# Altium PCB AFE.PcbDoc (part 1 of 3)
Units mm, origin at the board's own origin, x right, y up, seen from the top; angles counter-clockwise.
Board outline 95 x 50 mm, 4 copper layers (Top Layer, Ground Plane, +5V Power Plane, Bottom Layer), stack 0.778 mm thick; 152 components, 132 nets, 460 pads, 163 vias.
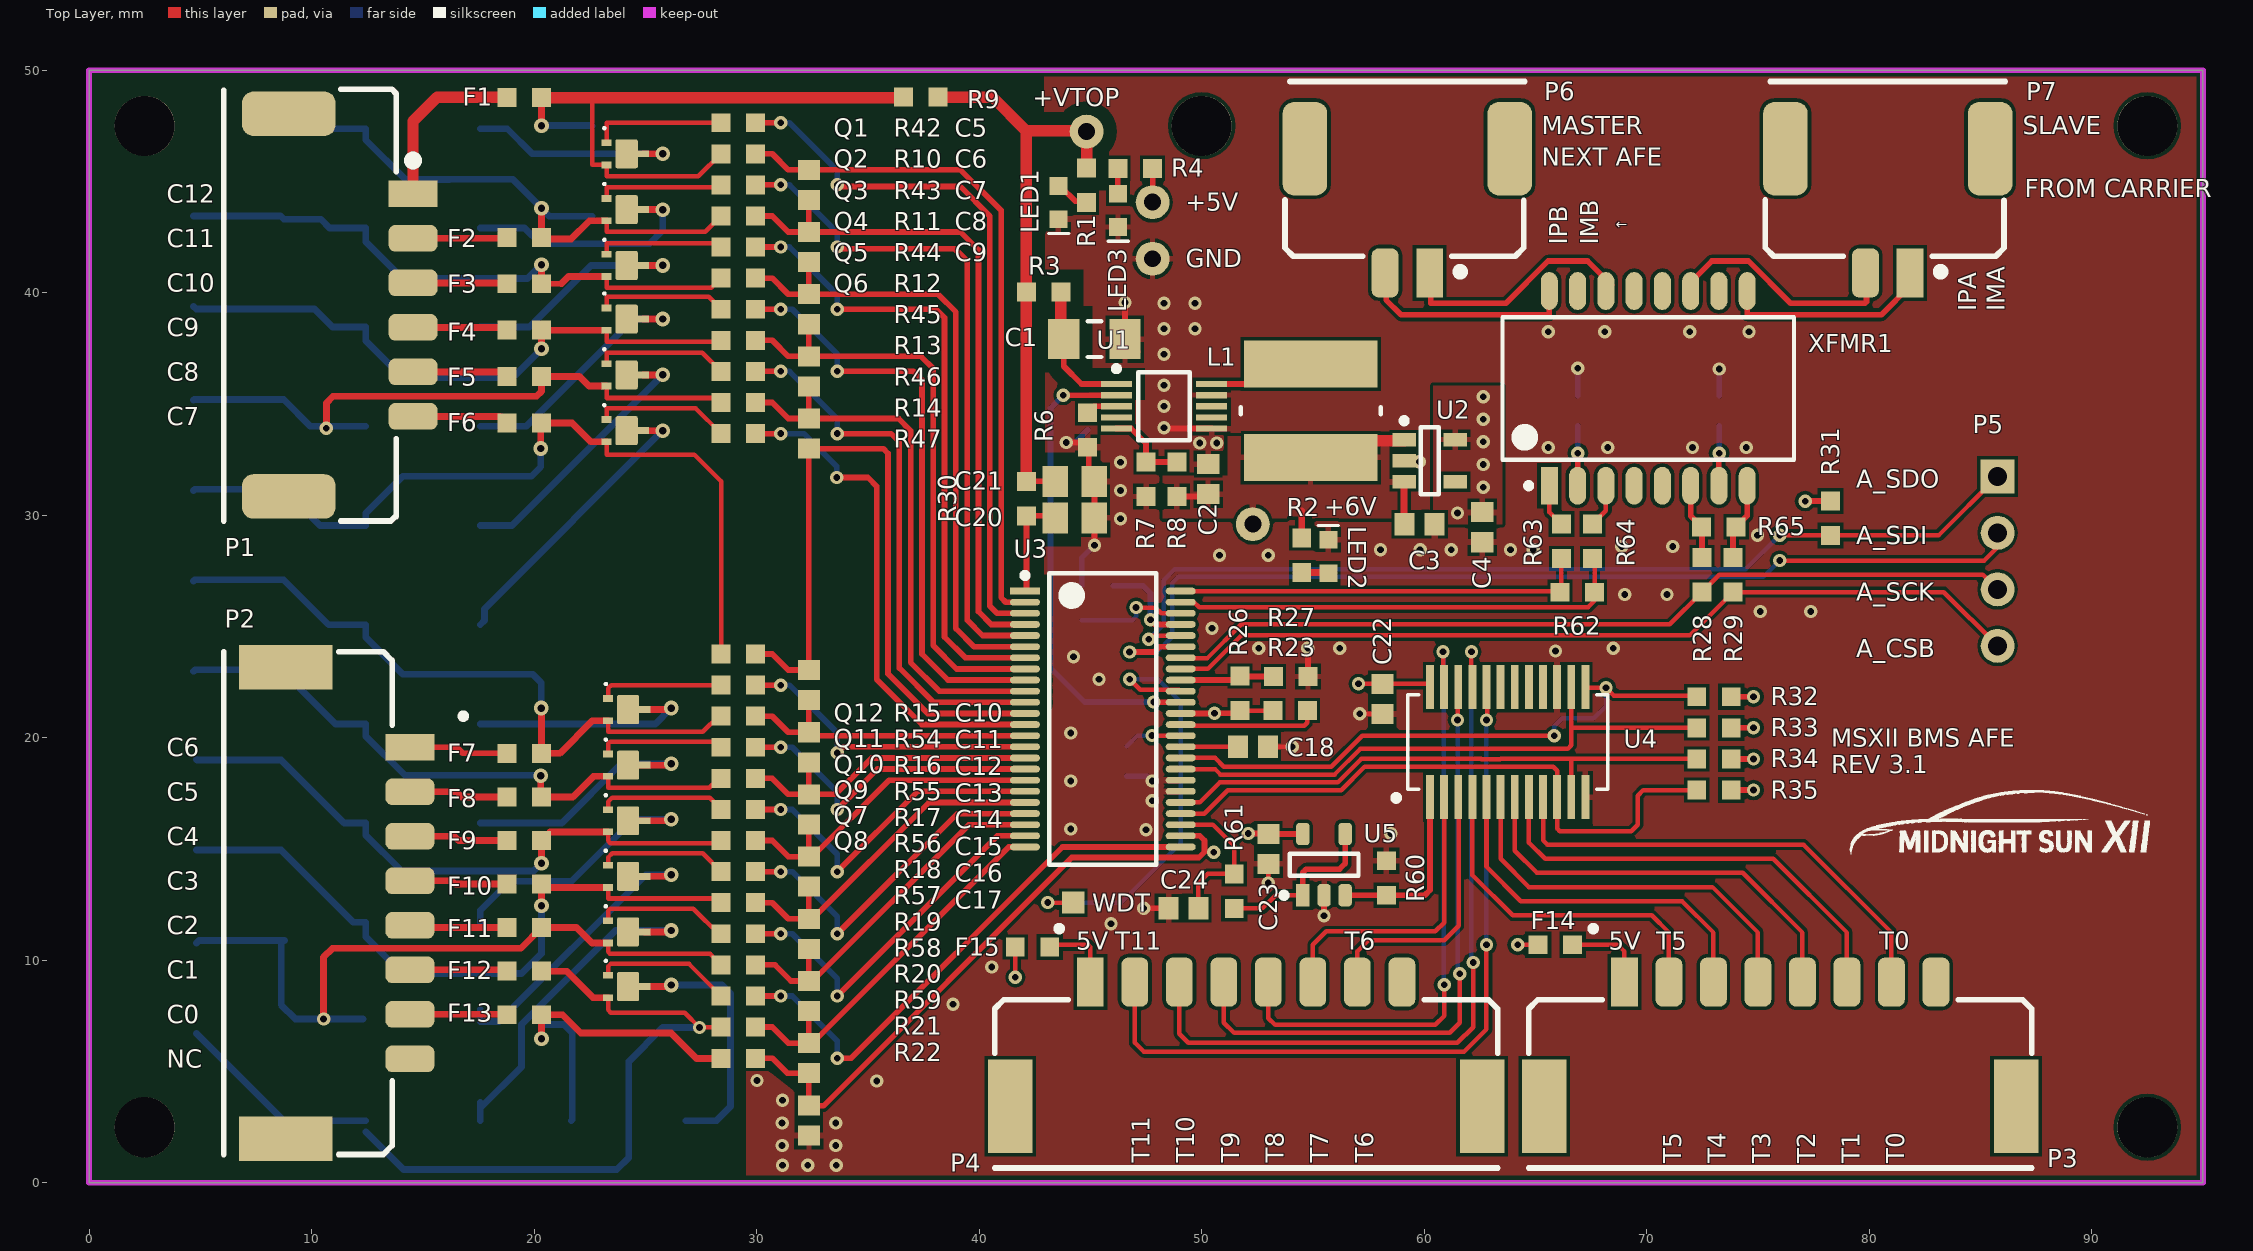
[diagram p0: Top Layer view]
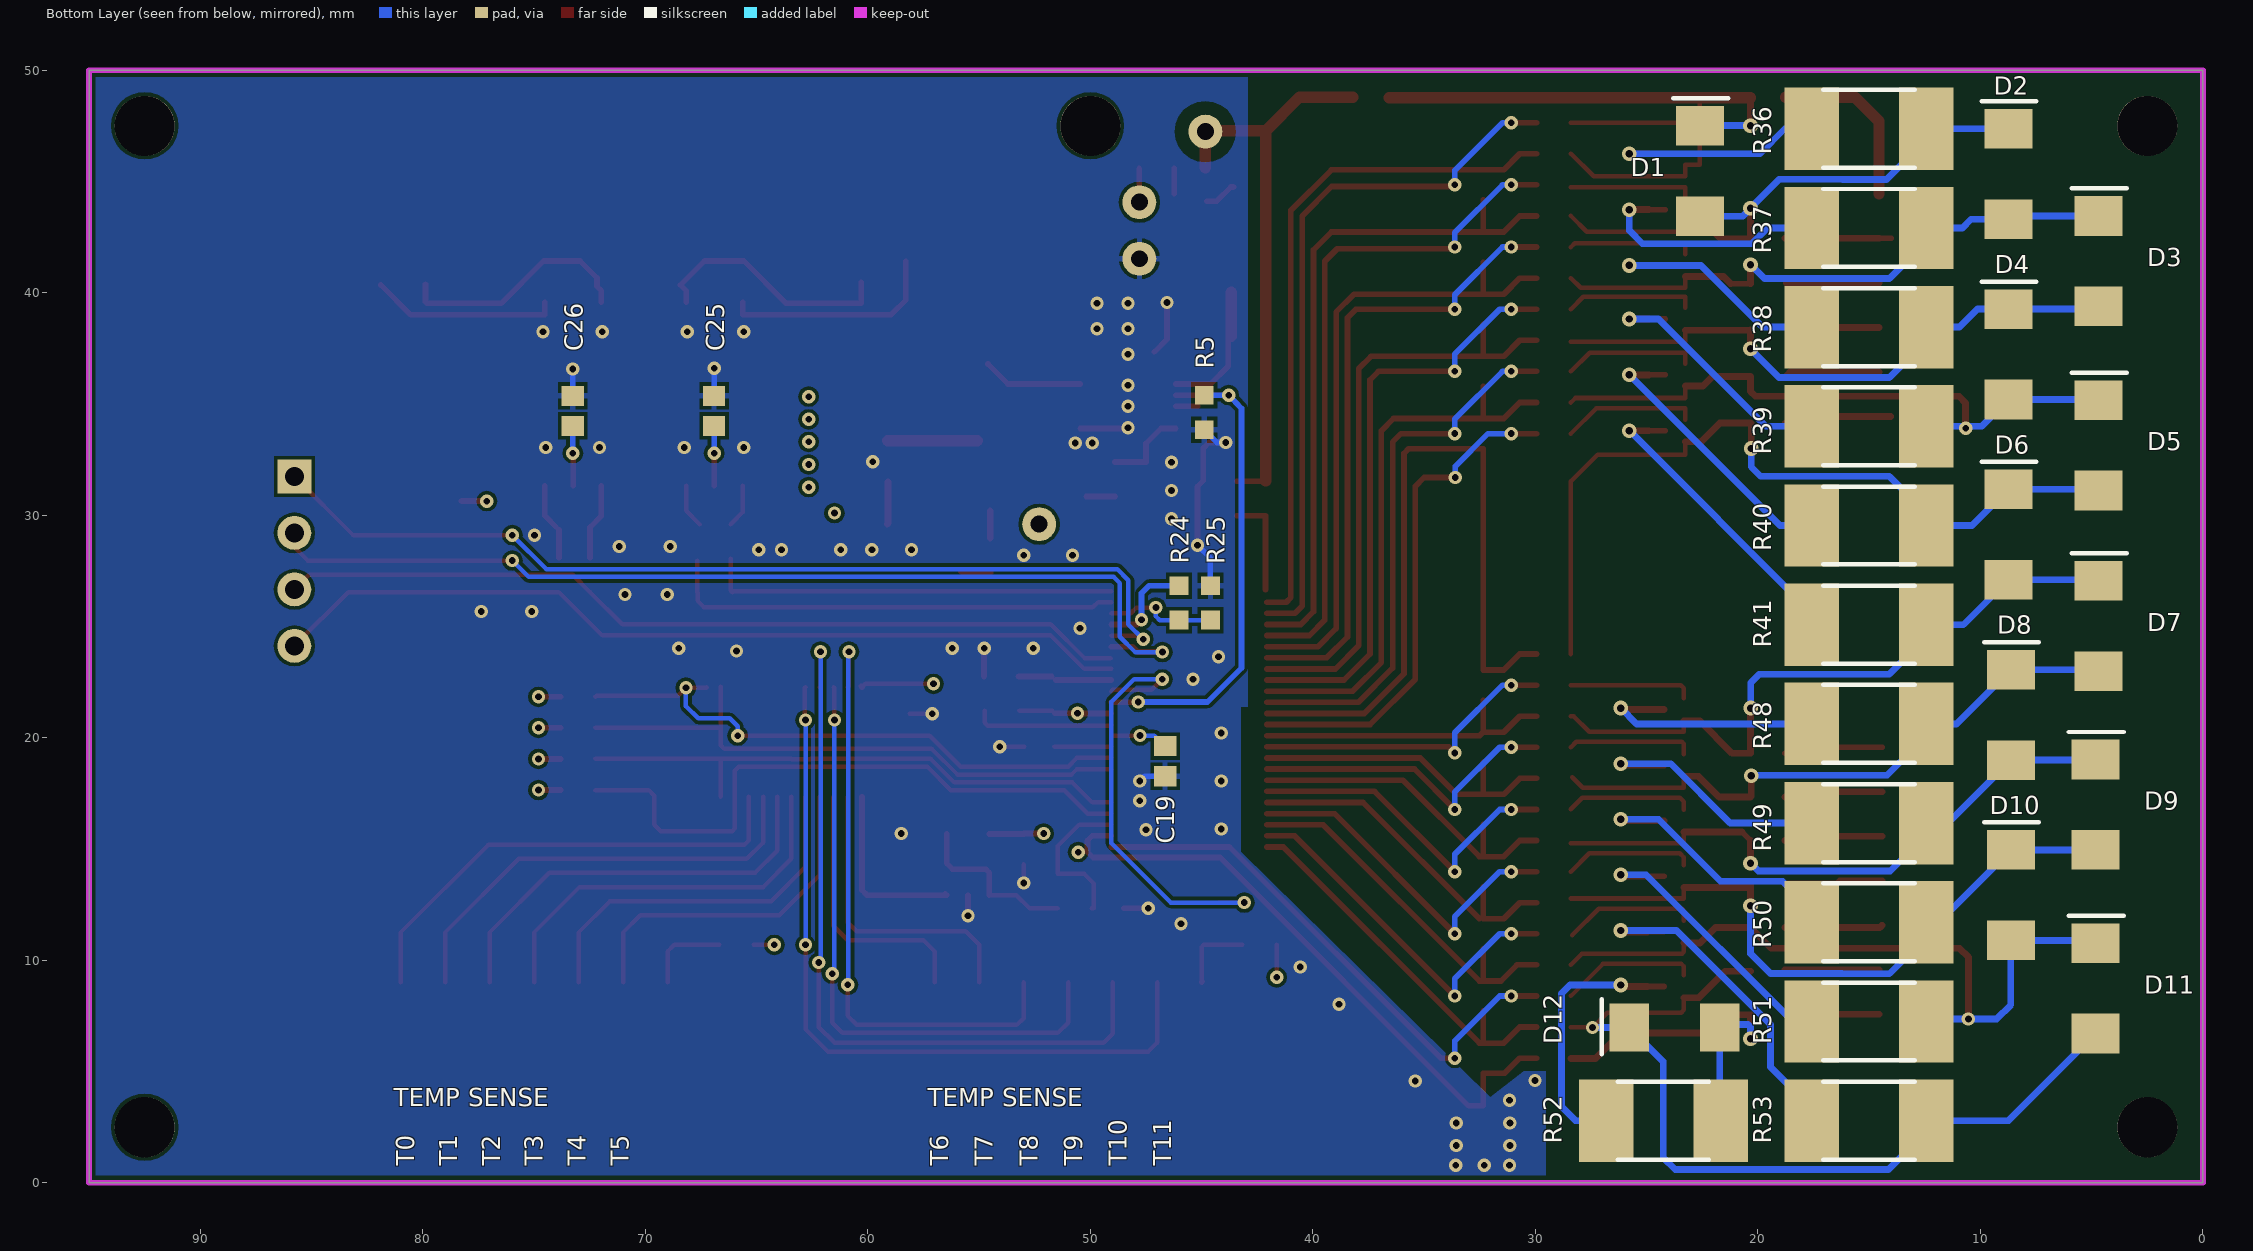
[diagram p1: Bottom Layer view, seen from below]
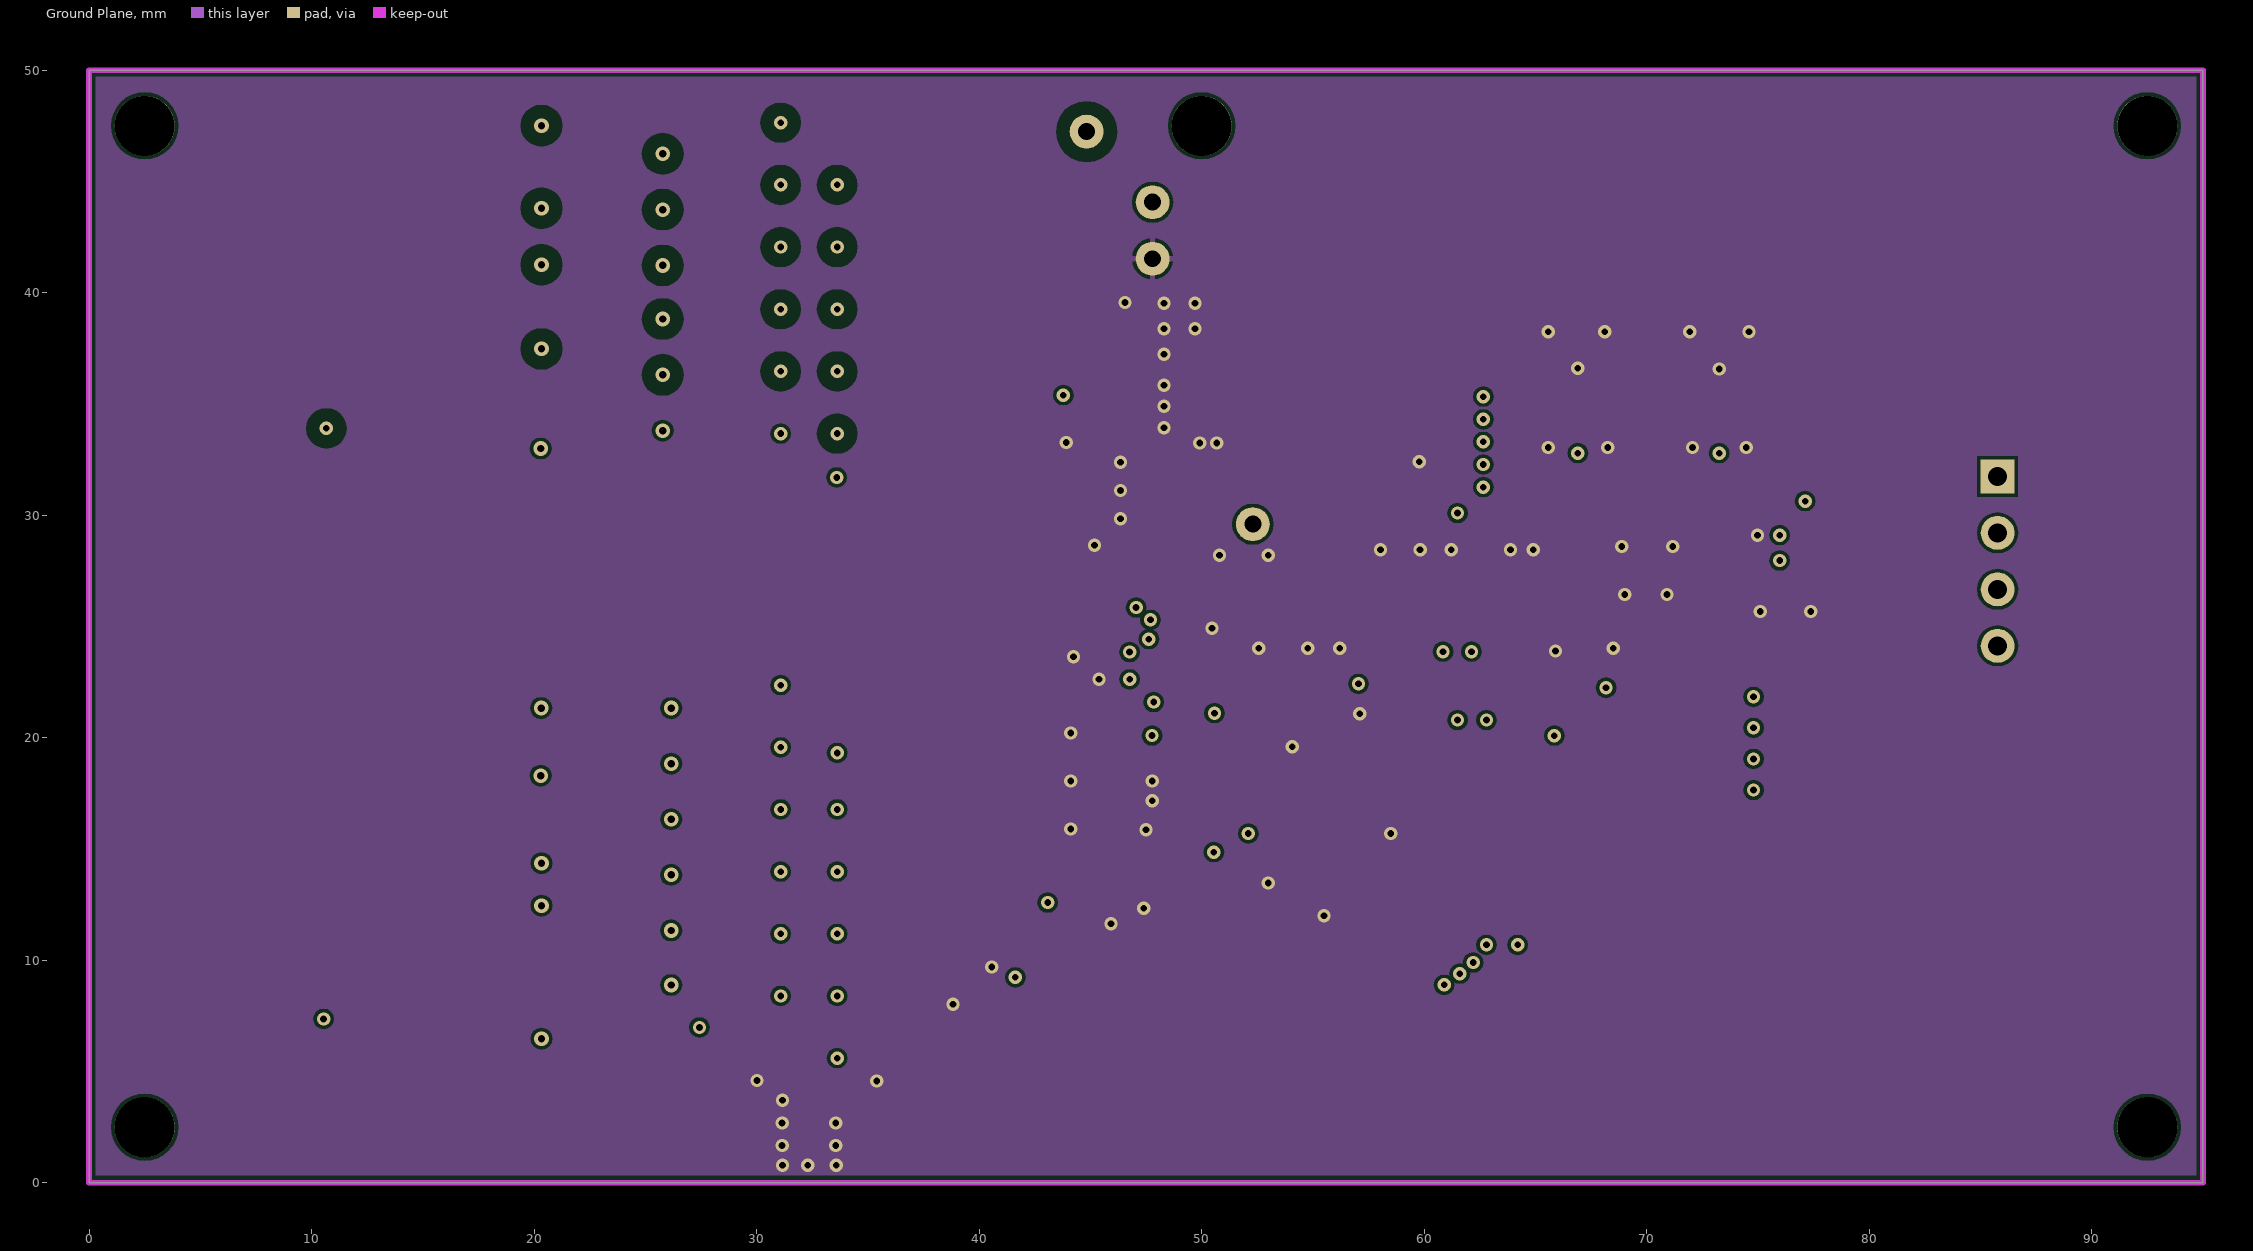
[diagram p2: Ground Plane]
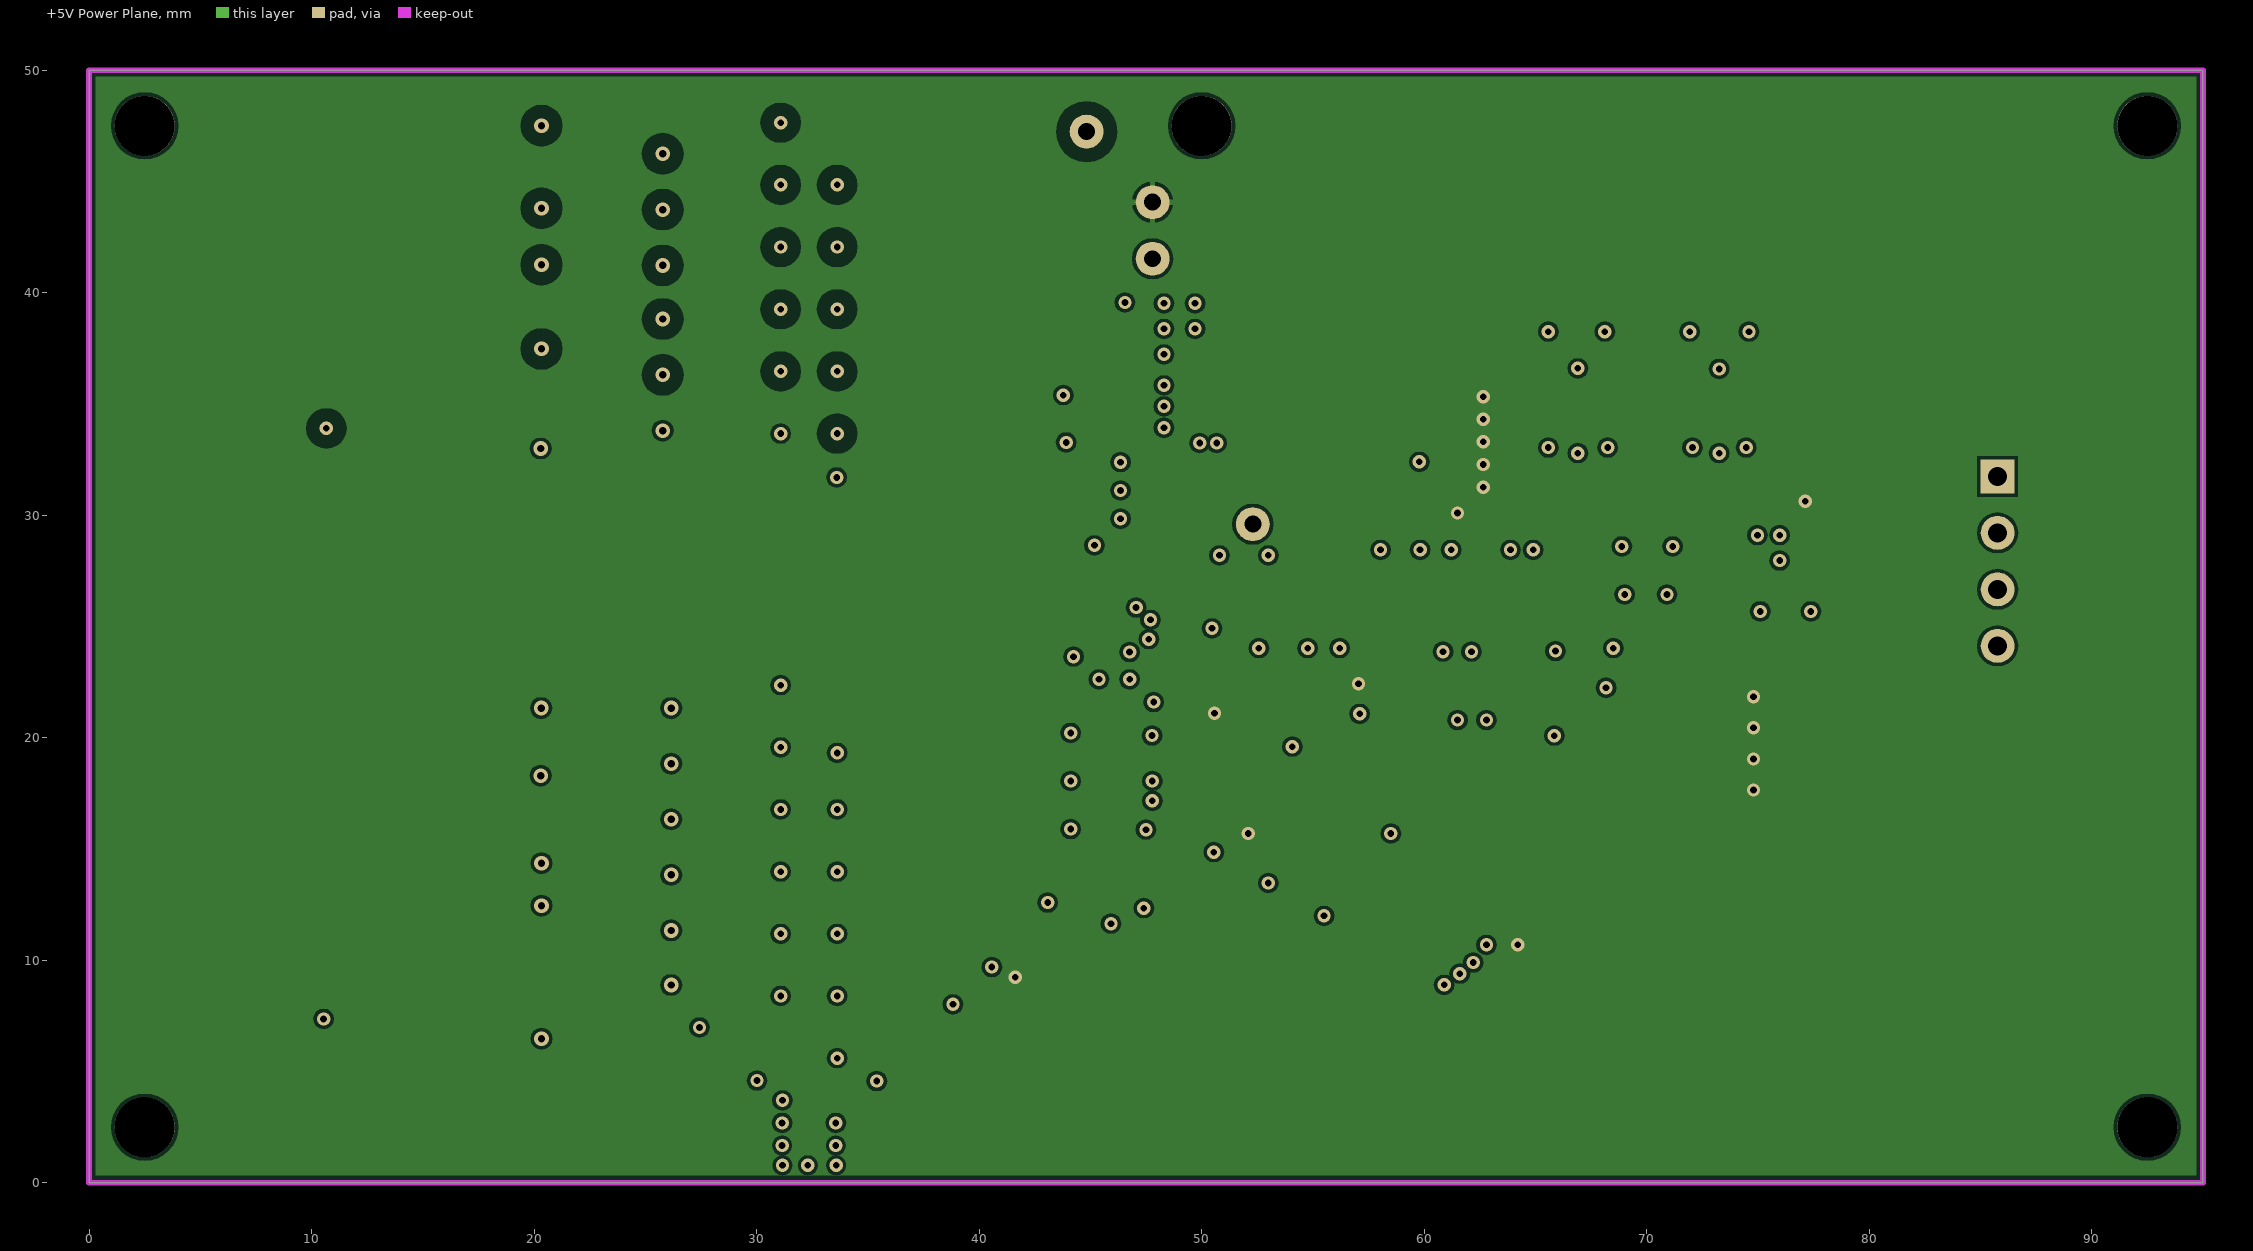
[diagram p3: +5V Power Plane]
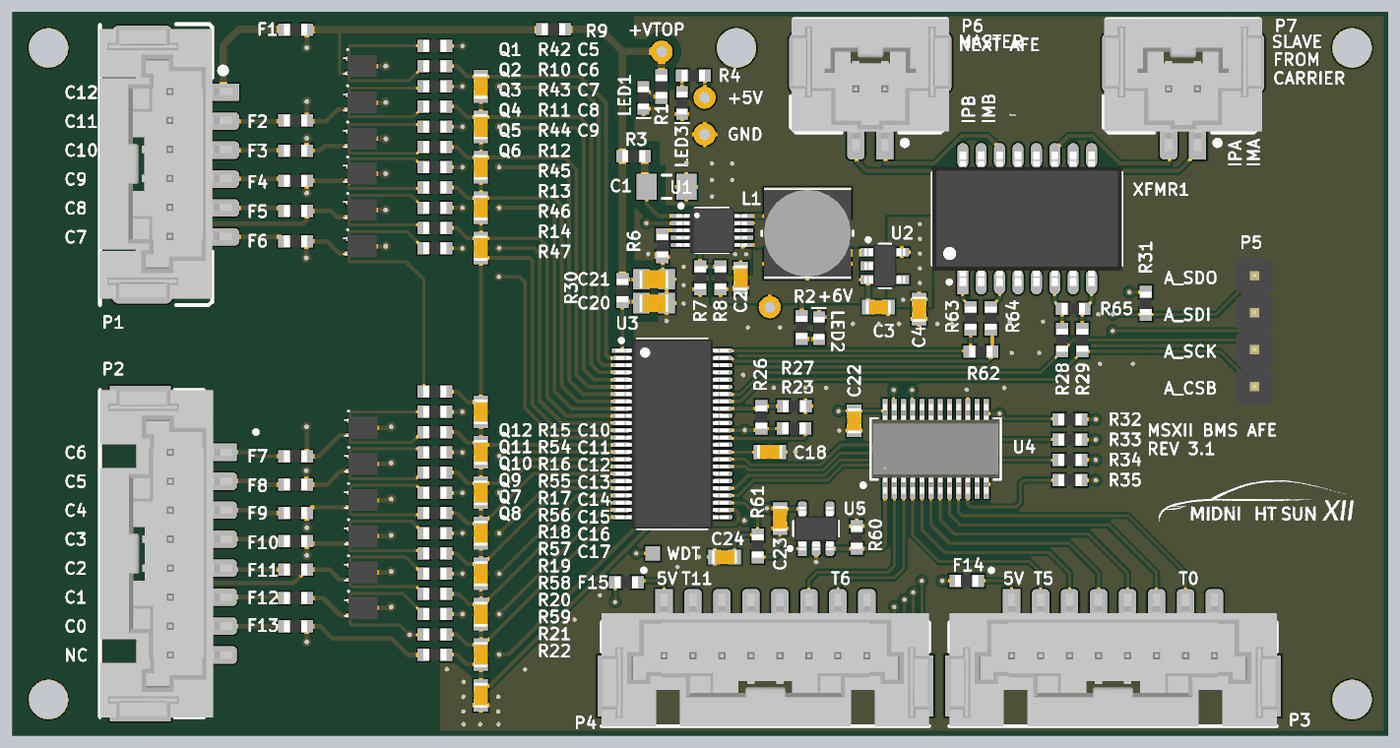
[diagram p5: 3D render of the assembled board from above, using the file's embedded part models]
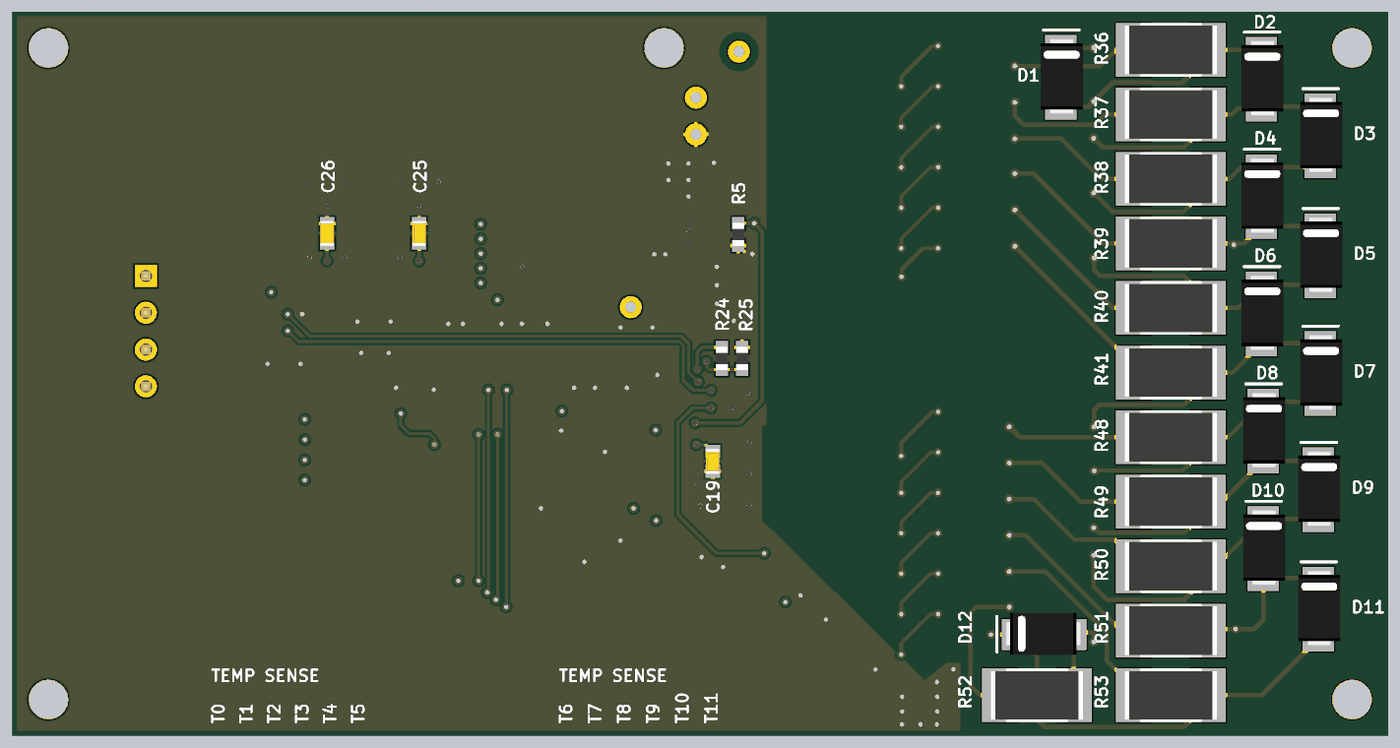
[diagram p6: 3D render of the assembled board from below, using the file's embedded part models]

## Layer stack, top to bottom
Top Solder: solder mask 0.0102, Solder Resist, Dk 3.5
Top Layer: signal copper 0.0356
Dielectric 1: core 0.254, FR-4, Dk 4.2
Ground Plane: signal copper 0.036
Dielectric 3: prepreg 0.127, Dk 4.2
+5V Power Plane: signal copper 0.036
Dielectric 2: core 0.254, Dk 4.2
Bottom Layer: signal copper 0.0356
Bottom Solder: solder mask 0.0102, Solder Resist, Dk 3.5

## Board outline
0,0 95,0 95,50 0,50

## Design rules (kind name [scope] priority, off if disabled: settings)
BoardOutlineClearance [All] p1: gap=0.295 ignorepadtopadclearanceinfootprint=FALSE
Clearance HV_IN_Clearance_to_GND [InNetClass('HV_IN') vs InNet('GND')] p1: gap=0.6 ignorepadtopadclearanceinfootprint=FALSE except(0: Arc-Hole Track-Hole SMDPad-Hole THPad-Hole Via-Hole Fill-Hole Poly-Hole Region-Hole Text-Hole)
Clearance HV_IN_Clearance_to_+6V [InNetClass('HV_IN') vs InNet('+6V')] p2: gap=0.6 ignorepadtopadclearanceinfootprint=FALSE except(0: Arc-Hole Track-Hole SMDPad-Hole THPad-Hole Via-Hole Fill-Hole Poly-Hole Region-Hole Text-Hole)
Clearance HV_IN_Clearance_to_+5V [InNetClass('HV_IN') vs InNet('+5V')] p3: gap=0.6 ignorepadtopadclearanceinfootprint=FALSE except(0: Arc-Hole Track-Hole SMDPad-Hole THPad-Hole Via-Hole Fill-Hole Poly-Hole Region-Hole Text-Hole)
Clearance [All] p4: gap=0.152 ignorepadtopadclearanceinfootprint=FALSE except(0: Arc-Hole Track-Hole SMDPad-Hole THPad-Hole Via-Hole Fill-Hole Poly-Hole Region-Hole Text-Hole)
DiffPairsRouting [All] p1: maxlimit=0.254 minlimit=0.254 mostfreqgap=0.254 toplayer_minwidth=0.152 toplayer_maxwidth=0.254 toplayer_prefwidth=0.203 midlayer1_minwidth=0.152 midlayer1_maxwidth=0.254 midlayer1_prefwidth=0.203 midlayer2_minwidth=0.152 midlayer2_maxwidth=0.254 midlayer2_prefwidth=0.203 bottomlayer_minwidth=0.152 bottomlayer_maxwidth=0.254 bottomlayer_prefwidth=0.203 maxuncoupledlength=12.7
HoleSize [All] p1: absolutevalues=TRUE maxlimit=100 minlimit=0.025 maxpercent=80.000 minpercent=20.000
MinimumSolderMaskSliver [All] p1: minsoldermaskwidth=0.3
PlaneConnect [All] p1: planeconnectstyle=Relief reliefexpansion=0.508 reliefentries=4 reliefconductorwidth=0.254 reliefairgap=0.152
PolygonConnect PolygonConnectStitchingVias [InNet('GND') & isVia] p1: connectstyle=Direct reliefconductorwidth=0.254 reliefentries=4 polygonreliefangle="90 Angle" airgapwidth=0.254
PolygonConnect PolygonConnect_5V_Vias [InNet('+5V') & IsVia] p2: connectstyle=Direct reliefconductorwidth=0.254 reliefentries=4 polygonreliefangle="90 Angle" airgapwidth=0.254
PolygonConnect [All] p3: connectstyle=Relief reliefconductorwidth=0.254 reliefentries=4 polygonreliefangle="90 Angle" airgapwidth=0.152
RoutingVias [All] p1: holewidth=0.3 width=0.6 viastyle="Through Hole" minholewidth=0.3 minwidth=0.6 maxholewidth=0.711 maxwidth=1.27
SilkToSilkClearance [All] p1: silktosilkclearance=0
SilkToSolderMaskClearance [IsPad] p1: minsilkscreentomaskgap=0.178 clearancetoexposedcopper=TRUE
SolderMaskExpansion [All] p1: expansion=0.102
Width [All] p1: maxlimit=2.54 minlimit=0.152 preferedwidth=0.305
24 further rules are at their usual default settings.

## Classes and differential pairs
component class Thermistor_Interface: C22 C23 C24 F14 F15 P3 P4 q R60 R61 U4 U5
component class Power_Supplies: +5V +6V +VTOP C1 C2 C3 C4 GND L1 LED1 LED3 R1 R2 R3 R4 R5 R6 R7 R8 U1 U2
component class isoSPI_Interface: C25 C26 P5 P6 P7 R62 R63 R64 R65 XFMR1
component class Cell+Balancing_Interface: D1 D2 D3 D4 D5 D6 D7 D8 D9 D10 D11 D12 F1 F2 F3 F4 F5 F6 F7 F8 F9 F10 F11 F12 F13 P1 P2 Q1 Q2 Q3 Q4 Q5 Q6 Q7 Q8 Q9 Q10 Q11 Q12 R36 R37 R38 R39 R40 R41 R42 R43 R44 R45 R46 R47 R48 R49 R50 R51 R52 R53 R54 R55 R56 R57 R58 R59
component class AFE: C5 C6 C7 C8 C9 C10 C11 C12 C13 C14 C15 C16 C17 C18 C19 C20 C21 R9 R10 R11 R12 R13 R14 R15 R16 R17 R18 R19 R20 R21 R22 R23 R24 R25 R26 R27 R28 R29 R30 R31 R32 R33 R34 R35 Text U3 WDT
net class HV_IN: +VTOP AFE_V+ C8 C8_F C8_R C9 C9_F C9_R C10 C10_F C10_R C11 C11_F C11_R C12 C12_F C12_R NetQ1_1 NetQ1_3 NetQ2_1 NetQ2_3 NetQ3_1 NetQ3_3 NetQ4_1 NetQ4_3 NetQ5_1 NetQ5_3 REG_VIN S8 S9 S10 S11 S12
differential pair IA: +IA_P -IA_N
differential pair IB: +IB_P -IB_N
differential pair ISO_A: +ISO_A_P -ISO_A_N
differential pair ISO_B: +ISO_B_P -ISO_B_N
differential pair IB_R: +IB_R_P -IB_R_N

## Components (designator, comment, footprint, x,y, rotation, side; value= is the part's Value field where it differs from the comment)
+5V "+5V" "Thru Test Point" 47.799,44.069 r90 top (schematic designator TH_TP5)
+6V "+6V" "Thru Test Point" 52.3,29.6 r90 top (schematic designator TH_TP4)
+VTOP "+VTOP" "Thru Test Point" 44.831,47.244 r90 top (schematic designator TH_TP1)
C1 "CAP CER 2.2UF 100V ±20% X7R 1206" "CAP, 1206" 45.179,37.914 r0 top
C2 "CAP CER 10uF 25V 20% X5R 0603" "CAP, 0603" 50.292,31.623 r90 top
C3 "CAP CER 1UF 50V 10% X7R 0603" "CAP, 0603" 59.8,29.6 r0 top
C4 "CAP CER 2.2UF 25V 10% X5R 0603" "CAP, 0603" 62.611,29.464 r270 top
C5 "CAP CER 10nF 50V 5% X7R 0603" "CAP, 0603" 32.352,44.848 r270 top
C6 "CAP CER 10nF 50V 5% X7R 0603" "CAP, 0603" 32.352,42.054 r270 top
C7 "CAP CER 10nF 50V 5% X7R 0603" "CAP, 0603" 32.352,39.26 r270 top
C8 "CAP CER 10nF 50V 5% X7R 0603" "CAP, 0603" 32.352,36.466 r270 top
C9 "CAP CER 10nF 50V 5% X7R 0603" "CAP, 0603" 32.352,33.672 r270 top
C10 "CAP CER 10nF 50V 5% X7R 0603" "CAP, 0603" 32.352,22.369 r270 top
C11 "CAP CER 10nF 50V 5% X7R 0603" "CAP, 0603" 32.352,19.575 r270 top
C12 "CAP CER 10nF 50V 5% X7R 0603" "CAP, 0603" 32.352,16.781 r270 top
C13 "CAP CER 10nF 50V 5% X7R 0603" "CAP, 0603" 32.352,13.987 r270 top
C14 "CAP CER 10nF 50V 5% X7R 0603" "CAP, 0603" 32.352,11.193 r270 top
C15 "CAP CER 10nF 50V 5% X7R 0603" "CAP, 0603" 32.352,8.399 r270 top
C16 "CAP CER 10nF 50V 5% X7R 0603" "CAP, 0603" 32.352,5.605 r270 top
C17 "CAP CER 10nF 50V 5% X7R 0603" "CAP, 0603" 32.352,2.794 r270 top
C18 "CAP CER 1UF 50V 10% X7R 0603" "CAP, 0603" 52.3,19.6 r0 top
C19 "CAP CER 1UF 50V 10% X7R 0603" "CAP, 0603" 46.64,18.948 r270 bottom
C20 "CAP CER 0.1UF 100V 10% X7R 0805" "CAP, 0805" 44.3,29.875 r0 top
C21 "CAP CER 0.1UF 100V 10% X7R 0805" "CAP, 0805" 44.3,31.525 r0 top
C22 "CAP CER 1UF 50V 10% X7R 0603" "CAP, 0603" 58.125,21.75 r270 top
C23 "CAP CER 0.1UF 50V 10% X7R 0603" "CAP, 0603" 53,15 r270 top
C24 "CAP CER 10nF 50V 5% X7R 0603" "CAP, 0603" 49.18,12.344 r180 top
C25 "CAP CER 20PF 50V ±5% C0G/NP0 0603" "CAP, 0603" 66.909,34.696 r90 bottom
C26 "CAP CER 20PF 50V ±5% C0G/NP0 0603" "CAP, 0603" 73.259,34.696 r90 bottom
D1 "DIODE ZENER 6.2V 5W DO214AA" "DO-214AA DIODE" 22.606,43.436 r90 bottom
D2 "DIODE ZENER 6.2V 5W DO214AA" "DO-214AA DIODE" 8.75,43.307 r90 bottom
D3 "DIODE ZENER 6.2V 5W DO214AA" "DO-214AA DIODE" 4.699,39.387 r90 bottom
D4 "DIODE ZENER 6.2V 5W DO214AA" "DO-214AA DIODE" 8.75,35.204 r90 bottom
D5 "DIODE ZENER 6.2V 5W DO214AA" "DO-214AA DIODE" 4.699,31.115 r90 bottom
D6 "DIODE ZENER 6.2V 5W DO214AA" "DO-214AA DIODE" 8.75,27.102 r90 bottom
D7 "DIODE ZENER 6.2V 5W DO214AA" "DO-214AA DIODE" 4.699,22.987 r90 bottom
D8 "DIODE ZENER 6.2V 5W DO214AA" "DO-214AA DIODE" 8.636,18.999 r90 bottom
D9 "DIODE ZENER 6.2V 5W DO214AA" "DO-214AA DIODE" 4.826,14.961 r90 bottom
D10 "DIODE ZENER 6.2V 5W DO214AA" "DO-214AA DIODE" 8.636,10.897 r90 bottom
D11 "DIODE ZENER 6.2V 5W DO214AA" "DO-214AA DIODE" 4.826,6.713 r90 bottom
D12 "DIODE ZENER 6.2V 5W DO214AA" "DO-214AA DIODE" 21.717,6.985 r0 bottom
F1 "FUSE SMT 750MA" "RES, 0603" 19.558,48.768 r0 top
F2 "FUSE SMT 750MA" "RES, 0603" 19.558,42.492 r0 top
F3 "FUSE SMT 750MA" "RES, 0603" 19.558,40.407 r0 top
F4 "FUSE SMT 750MA" "RES, 0603" 19.558,38.322 r0 top
F5 "FUSE SMT 750MA" "RES, 0603" 19.558,36.237 r0 top
F6 "FUSE SMT 750MA" "RES, 0603" 19.558,34.152 r0 top
F7 "FUSE SMT 750MA" "RES, 0603" 19.558,19.304 r0 top
F8 "FUSE SMT 750MA" "RES, 0603" 19.558,17.346 r0 top
F9 "FUSE SMT 750MA" "RES, 0603" 19.558,15.388 r0 top
F10 "FUSE SMT 750MA" "RES, 0603" 19.558,13.43 r0 top
F11 "FUSE SMT 750MA" "RES, 0603" 19.558,11.472 r0 top
F12 "FUSE SMT 750MA" "RES, 0603" 19.558,9.514 r0 top
F13 "FUSE SMT 750MA" "RES, 0603" 19.558,7.556 r0 top
F14 "FUSE 250MA 32VDC 0603" "RES, 0603" 65.9,10.7 r180 top
F15 "FUSE 250MA 32VDC 0603" "RES, 0603" 42.4,10.6 r180 top
GND "+6V" "Thru Test Point" 47.799,41.529 r90 top (schematic designator TH_TP6)
L1 "IND 220uH 0.59A 20%" INDP6060X23N 54.9,34.7 r270 top
LED1 "LED RED CLEAR 2V 0603" LED_0603 43.561,44.755 r270 top
LED2 "LED YELLOW CLEAR 2.1V 0603" LED_0603 55.71,27.45 r90 top
LED3 "LED GREEN CLEAR 2V 0603" LED_0603 46.228,44.399 r270 top
P1 "DURA-CLIK" "CONN, 6POS DURA-CLIK VERT" 14.56,44.445 r270 top
P2 "CONN 8POS DURA-CLIK 0.079\"" "CONN, 8POS DURA-CLIK" 14.42,19.575 r270 top
P3 "CONN 8POS DURA-CLIK 0.079\"" "CONN, 8POS DURA-CLIK" 69,9.025 r0 top locked
P4 "CONN 8POS DURA-CLIK 0.079\"" "CONN, 8POS DURA-CLIK" 45,9.025 r0 top locked
P5 "CONN 4POS HEADR MALE 0.1\"" "CONN 4POS 0.100\"" 85.772,31.75 r270 top
P6 "Dura-Clik" "CONN, 2POS Dura-Click Vertical" 60.245,40.894 r180 top
P7 "Dura-Clik" "CONN, 2POS Dura-Click Vertical" 81.835,40.894 r180 top
Q1 "MOSFET P-CH 16V 2.5A X2-DFN2015" DFN86P197X40-3N 24.161,46.245 r0 top
Q2 "MOSFET P-CH 16V 2.5A X2-DFN2015" DFN86P197X40-3N 24.161,43.737 r0 top
Q3 "MOSFET P-CH 16V 2.5A X2-DFN2015" DFN86P197X40-3N 24.161,41.229 r0 top
Q4 "MOSFET P-CH 16V 2.5A X2-DFN2015" DFN86P197X40-3N 24.16,38.818 r0 top
Q5 "MOSFET P-CH 16V 2.5A X2-DFN2015" DFN86P197X40-3N 24.16,36.31 r0 top
Q6 "MOSFET P-CH 16V 2.5A X2-DFN2015" DFN86P197X40-3N 24.16,33.802 r0 top
Q7 "MOSFET P-CH 16V 2.5A X2-DFN2015" DFN86P197X40-3N 24.224,21.269 r0 top
Q8 "MOSFET P-CH 16V 2.5A X2-DFN2015" DFN86P197X40-3N 24.224,18.771 r0 top
Q9 "MOSFET P-CH 16V 2.5A X2-DFN2015" DFN86P197X40-3N 24.224,16.273 r0 top
Q10 "MOSFET P-CH 16V 2.5A X2-DFN2015" DFN86P197X40-3N 24.224,13.775 r0 top
Q11 "MOSFET P-CH 16V 2.5A X2-DFN2015" DFN86P197X40-3N 24.224,11.277 r0 top
Q12 "MOSFET P-CH 16V 2.5A X2-DFN2015" DFN86P197X40-3N 24.224,8.823 r0 top
R1 "RES 33K OHM 1% 1/4W 0603" "RES, 0603" 44.831,44.831 r270 top
R2 "RES 3.3K OHM 1% 1/4W 0603" "RES, 0603" 54.5,28.2 r270 top
R3 "RES 820 OHM 5% 1/4W 0603" "RES, 0603" 42.897,40.03 r0 top
R4 "RES 3.3K OHM 1% 1/4W 0603" "RES, 0603" 47.015,45.593 r180 top
R5 "RES 10K OHM 1% 1/10W 0603" "RES, 0603" 44.882,34.62 r270 bottom
R6 "RES 191K OHM 1% 1/10W 0603" "RES, 0603" 44.878,33.833 r270 top
R7 "RES 39.2K OHM 1% 1/10W 0603" "RES, 0603" 47.498,31.623 r270 top
R8 "RES 255K OHM 1% 1/10W 0603" "RES, 0603" 48.895,31.623 r270 top
R9 "RES 0.0 OHM 1/4W 0603" "RES, 0603" 37.369,48.793 r180 top
R10 "RES 100 OHM 1% 1/10W 0603" "RES, 0603" 29.177,46.245 r0 top
R11 "RES 100 OHM 1% 1/10W 0603" "RES, 0603" 29.177,43.451 r0 top
R12 "RES 100 OHM 1% 1/10W 0603" "RES, 0603" 29.177,40.657 r0 top
R13 "RES 100 OHM 1% 1/10W 0603" "RES, 0603" 29.177,37.863 r0 top
R14 "RES 100 OHM 1% 1/10W 0603" "RES, 0603" 29.177,35.069 r0 top
R15 "RES 100 OHM 1% 1/10W 0603" "RES, 0603" 29.177,23.766 r0 top
R16 "RES 100 OHM 1% 1/10W 0603" "RES, 0603" 29.177,20.972 r0 top
R17 "RES 100 OHM 1% 1/10W 0603" "RES, 0603" 29.177,18.178 r0 top
R18 "RES 100 OHM 1% 1/10W 0603" "RES, 0603" 29.177,15.384 r0 top
R19 "RES 100 OHM 1% 1/10W 0603" "RES, 0603" 29.177,12.59 r0 top
R20 "RES 100 OHM 1% 1/10W 0603" "RES, 0603" 29.177,9.796 r0 top
R21 "RES 100 OHM 1% 1/10W 0603" "RES, 0603" 29.177,7.002 r0 top
R22 "RES 100 OHM 1% 1/10W 0603" "RES, 0603" 29.177,5.588 r0 top
R23 "RES 0.0 OHM 1/4W 0603" "RES, 0603" 53.975,21.225 r0 top
R24 "RES 1.4k OHM 1% 1/10W 0603" "RES, 0603" 46.021,26.06 r270 bottom
R25 "RES 604 OHM 1% 1/10W 0603" "RES, 0603" 44.608,26.06 r90 bottom
R26 "RES 0.0 OHM 1/4W 0603" "RES, 0603" 51.72,21.996 r270 top
R27 "RES 0.0 OHM 1/4W 0603" "RES, 0603" 54.006,22.758 r0 top
R28 "RES 0.0 OHM 1/4W 0603" "RES, 0603" 72.484,27.322 r90 top
R29 "RES 0.0 OHM 1/4W 0603" "RES, 0603" 73.881,27.322 r90 top
R30 "RES 100 OHM 1% 1/10W 0603" "RES, 0603" 42.131,30.751 r270 top
R31 "RES 4.7K OHM 1% 1/10W 0603" "RES, 0603" 78.263,29.87 r270 top
R32 "RES 4.7K OHM 1% 1/10W 0603" "RES, 0603" 73.025,21.844 r0 top
R33 "RES 4.7K OHM 1% 1/10W 0603" "RES, 0603" 73.025,20.447 r0 top
R34 "RES 4.7K OHM 1% 1/10W 0603" "RES, 0603" 73.025,19.05 r0 top
R35 "RES 4.7K OHM 1% 1/10W 0603" "RES, 0603" 73.025,17.653 r0 top
R36 "RES 15 OHM 1% 2W 2512" RES2512 15.008,47.371 r0 bottom
R37 "RES 15 OHM 1% 2W 2512" RES2512 15.008,42.913 r0 bottom
R38 "RES 15 OHM 1% 2W 2512" RES2512 15.008,38.456 r0 bottom
R39 "RES 15 OHM 1% 2W 2512" RES2512 15.008,33.998 r0 bottom
R40 "RES 15 OHM 1% 2W 2512" RES2512 15.008,29.54 r0 bottom
R41 "RES 15 OHM 1% 2W 2512" RES2512 15.008,25.082 r0 bottom
R42 "RES 3.3K OHM 1% 1/4W 0603" "RES, 0603" 29.177,47.642 r180 top
R43 "RES 3.3K OHM 1% 1/4W 0603" "RES, 0603" 29.177,44.848 r180 top
R44 "RES 3.3K OHM 1% 1/4W 0603" "RES, 0603" 29.177,42.054 r180 top
R45 "RES 3.3K OHM 1% 1/4W 0603" "RES, 0603" 29.177,39.26 r180 top
R46 "RES 3.3K OHM 1% 1/4W 0603" "RES, 0603" 29.177,36.466 r180 top
R47 "RES 3.3K OHM 1% 1/4W 0603" "RES, 0603" 29.177,33.672 r180 top
R48 "RES 15 OHM 1% 2W 2512" RES2512 15.008,20.625 r0 bottom
R49 "RES 15 OHM 1% 2W 2512" RES2512 15.008,16.167 r0 bottom
R50 "RES 15 OHM 1% 2W 2512" RES2512 15.008,11.709 r0 bottom
R51 "RES 15 OHM 1% 2W 2512" RES2512 15.008,7.252 r0 bottom
R52 "RES 15 OHM 1% 2W 2512" RES2512 24.25,2.794 r0 bottom
R53 "RES 15 OHM 1% 2W 2512" RES2512 15.008,2.794 r0 bottom
R54 "RES 3.3K OHM 1% 1/4W 0603" "RES, 0603" 29.177,22.369 r180 top
R55 "RES 3.3K OHM 1% 1/4W 0603" "RES, 0603" 29.177,19.575 r180 top
R56 "RES 3.3K OHM 1% 1/4W 0603" "RES, 0603" 29.177,16.781 r180 top
R57 "RES 3.3K OHM 1% 1/4W 0603" "RES, 0603" 29.177,13.987 r180 top
R58 "RES 3.3K OHM 1% 1/4W 0603" "RES, 0603" 29.177,11.193 r180 top
R59 "RES 3.3K OHM 1% 1/4W 0603" "RES, 0603" 29.177,8.399 r180 top
R60 "RES 10K OHM 1% 1/10W 0603" "RES, 0603" 58.3,13.7 r90 top
R61 "RES 100 OHM 1% 1/10W 0603" "RES, 0603" 51.466,13.106 r90 top
R62 "RES 120 OHM 1% 1/10W 0603" "RES, 0603" 66.878,26.543 r0 top
R63 "RES 0.0 OHM 1/4W 0603" "RES, 0603" 66.167,28.829 r90 top
R64 "RES 0.0 OHM 1/4W 0603" "RES, 0603" 67.564,28.829 r90 top
R65 "RES 120 OHM 1% 1/10W 0603" "RES, 0603" 73.246,29.481 r0 top
U1 "IC REG BUCK ADJ 0.1A 10UMAX" TSSOP50P490X110-10N 48.307,34.9 r0 top
U2 "IC REG LDO 5V 0.1A SOT23-5" SOT95P280X145-5N 60.25,32.45 r0 top
U3 "IC MONITOR BATT STACK 48SSOP" SSOP50P780X200-48N 45.56,20.845 r0 top
U4 "IC MUX/DEMUX 1X16 24SSOP" SSOP-24_GN 63.754,19.812 r90 top
U5 "IC OP AMP GEN PURPOSE RR 10MHZ SOT-23-5" "IC OP AMP GP RR 10MHZ SOT-23-5" 55.5,14.3 r90 top
WDT "WDT" "Test Point" 44.227,12.598 r90 top (schematic designator TP1)
XFMR1 "IC PULSE XFMR 1CT:1CT 350UH SMD" "IC, PULSE XFMR 1CT:1CT 350UH SMD" 70.071,35.704 r90 top

## Footprints (in the part's own frame and the unit in brackets; to place one, negate y for a bottom-side part, rotate by r counter-clockwise, add the part's x,y. Pads: shape width x height; smd on the part's side, far side on the other; paste and mask are expansions set on the pad)
"CAP, 0603" [mm] "Chip Capacitor, 2-Leads, Body 1.60x0.81mm, IPC Medium Density"
  rect 0.9x1 smd mask+0.076: 1(-0.675,0) 2(0.675,0)
  body extent -0.87,-0.48 0.87,0.48, height 0.9
"CAP, 0805" [mm] "Chip Capacitor, 2-Leads, Body 2.00x1.25mm, IPC Medium Density"
  rect 1.15x1.4 smd: 1(-0.875,0) 2(0.875,0)
  body extent -1,-0.63 1,0.63, height 1.25
"CAP, 1206" [mm] "Chip Capacitor, 2-Leads, Body 3.20x1.60mm, IPC Medium Density"
  rect 1.4x1.8 smd: 1(-1.375,0) 2(1.375,0)
  silkscreen extent -0.3,-0.8 0.3,0.8, body extent -1.68,-0.87 1.67,0.87, height 1.8
"CONN 4POS 0.100\"" [mil]
  rect 60x60 hole 33.46: 1(0,0)
  round 60 hole 33.46: 2(100,0) 3(200,0) 4(300,0)
  body extent -50,-50 350,50, height 336
"CONN, 2POS Dura-Click Vertical" [mm] "WM7169CT-ND"
  rect 1.2x2.2 smd: 1(0,0)
  rrect50% 1.2x2.2 smd: 2(2,0)
  rrect50% 2x4.2 smd: 3(-3.6,-5.58) 3(5.6,-5.58)
  silkscreen extent -4.28,-8.6 6.5,0.05, body extent -4.45,-8.63 6.45,0.52, height 8
"CONN, 6POS DURA-CLIK VERT" [mm]
  rect 1.2x2.2 smd: 1(0,0)
  rrect50% 1.2x2.2 smd: 2(2,0) 3(4,0) 4(6,0) 5(8,0) 6(10,0)
  rrect50% 2x4.2 smd: 7(-3.6,-5.58) 7(13.6,-5.58)
  silkscreen extent -4.7,-8.5 14.7,0.15, body extent -4.35,-8.54 14.25,0.61, height 7.97
"CONN, 8POS DURA-CLIK" [mm] "WM10868CT-ND"
  rect 1.2x2.2 smd: 1(0,0)
  rrect50% 1.2x2.2 smd: 2(2,0) 3(4,0) 4(6,0) 5(8,0) 6(10,0) 7(12,0) 8(14,0)
  rect 2x4.2 smd: ""(-3.6,-5.58) ""(17.6,-5.58)
  silkscreen extent -4.3,-8.36 18.3,2.53, body extent -4.3,-8.36 18.3,0.79, height 8.02
DFN86P197X40-3N [mm] "DFN, 3-Leads, Body 1.47x1.97mm, Pitch 0.86mm, IPC Medium Density"
  rect 0.45x0.3 smd: 1(-0.9,0.5) 2(-0.9,-0.5)
  rrect15% 1x1.3 smd: 3(0,0)
  rect 0.5x0.31 smd: 3(0.75,0)
  silkscreen extent -1.05,1.1 -0.95,1.2, body extent -1.31,-0.75 1,0.75, height 0.4
"DO-214AA DIODE" [mil] "Zener Diode 16V 5W SMBJ5353B-TP"
  rect 70x85 smd: 1(0,0) 2(160,0)
  silkscreen extent 209,-50 209,47, body extent -21,-60 187,55, height 95
"IC OP AMP GP RR 10MHZ SOT-23-5" [mm] "SOT23, 5-Leads, Body 2.90x2.80mm, Pitch 0.95mm, IPC Medium Density"
  rect 1x0.6 smd: 1(-1.375,0.95)
  rrect50% 1x0.6 smd: 2(-1.375,0) 3(-1.375,-0.95) 4(1.375,-0.95) 5(1.375,0.95)
  silkscreen extent -1.5,-1.55 0.5,1.92, body extent -1.5,-1.53 1.5,1.53, height 1.45
"IC, PULSE XFMR 1CT:1CT 350UH SMD" [mm] "PULSE XFMR 1CT:1CT 350UH SMD"
  rect 1.7x0.76 smd: 1(-4.375,4.445)
  oval 1.7x0.76 smd: 2(-4.375,3.175) 3(-4.375,1.905) 4(-4.375,0.635) 5(-4.375,-0.635) 6(-4.375,-1.905) 7(-4.375,-3.175) 8(-4.375,-4.445) 9(4.375,-4.445) 10(4.375,-3.175) 11(4.375,-1.905) 12(4.375,-0.635) 13(4.375,0.635) 14(4.375,1.905) 15(4.375,3.175) 16(4.375,4.445)
  silkscreen extent -4.5,-6.55 3.2,6.55, body extent -4.65,-6.55 4.65,6.55, height 5.9
INDP6060X23N [mm] "Precision Wire Wound Inductor, 2-Leads, Body 6.00x6.00mm, IPC Medium Density"
  rect 2.1x6 smd: 1(-2.1,0) 2(2.1,0)
  silkscreen extent -0.15,-3.15 0.15,3.15, body extent -3.1,-3 3.1,3, height 2.39
LED_0603 [mm]
  rect 0.8x0.8 smd: 1(-0.05,0.01) 2(1.45,0.01)
  silkscreen extent 2.09,-0.43 2.09,0.48, body extent -0.1,-0.39 1.5,0.41, height 0.55
RES2512 [mm]
  rect 2.45x3.7 smd: 1(-2.575,0) 2(2.575,0)
  silkscreen extent -2.05,-1.75 2.05,1.75, body extent -3.17,-1.67 3.17,1.67, height 0.65
"RES, 0603" [mm] "Chip Resistor, 2-Leads, Body 1.60x0.80mm, IPC Medium Density"
  rect 0.85x0.85 smd: 1(-0.775,0) 2(0.775,0)
  body extent -0.8,-0.4 0.8,0.4, height 0.55
SOT95P280X145-5N [mm] "SOT23, 5-Leads, Body 2.95x2.80mm, Pitch 0.95mm, IPC Medium Density"
  rect 1.05x0.6 smd: 1(-1.15,0.95) 2(-1.15,0) 3(-1.15,-0.95) 4(1.15,-0.95) 5(1.15,0.95)
  silkscreen extent -1.27,-1.5 0.4,1.92, body extent -1.4,-1.48 1.4,1.48, height 1.45
SSOP50P780X200-48N [mm] "SSOP, 48-Leads, Body 12.80x5.30mm, Pitch 0.50mm, IPC Medium Density"
  rect 1.35x0.3 smd: 1(-3.5,5.75)
  oval 1.35x0.3 smd: 2(-3.5,5.25) 3(-3.5,4.75) 4(-3.5,4.25) 5(-3.5,3.75) 6(-3.5,3.25) 7(-3.5,2.75) 8(-3.5,2.25) 9(-3.5,1.75) 10(-3.5,1.25) 11(-3.5,0.75) 12(-3.5,0.25) 13(-3.5,-0.25) 14(-3.5,-0.75) 15(-3.5,-1.25) 16(-3.5,-1.75) 17(-3.5,-2.25) 18(-3.5,-2.75) 19(-3.5,-3.25) 20(-3.5,-3.75) 21(-3.5,-4.25) 22(-3.5,-4.75) 23(-3.5,-5.25) 24(-3.5,-5.75) 25(3.5,-5.75) 26(3.5,-5.25) 27(3.5,-4.75) 28(3.5,-4.25) 29(3.5,-3.75) 30(3.5,-3.25) 31(3.5,-2.75) 32(3.5,-2.25) 33(3.5,-1.75) 34(3.5,-1.25) 35(3.5,-0.75) 36(3.5,-0.25) 37(3.5,0.25) 38(3.5,0.75) 39(3.5,1.25) 40(3.5,1.75) 41(3.5,2.25) 42(3.5,2.75) 43(3.5,3.25) 44(3.5,3.75) 45(3.5,4.25) 46(3.5,4.75) 47(3.5,5.25) 48(3.5,5.75)
  silkscreen extent -3.62,-6.55 2.4,6.57, body extent -3.9,-6.55 3.9,6.55, height 2
SSOP-24_GN [mil]
  rect 78x14 smd: 1(-97,137.5) 2(-97,112.5) 3(-97,87.5) 4(-97,62.5) 5(-97,37.5) 6(-97,12.5) 7(-97,-12.5) 8(-97,-37.5) 9(-97,-62.5) 10(-97,-87.5) 11(-97,-112.5) 12(-97,-137.5) 13(97,-137.5) 14(97,-112.5) 15(97,-87.5) 16(97,-62.5) 17(97,-37.5) 18(97,-12.5) 19(97,12.5) 20(97,37.5) 21(97,62.5) 22(97,87.5) 23(97,112.5) 24(97,137.5)
  silkscreen extent -104,-177 84,203, body extent -122,-172 122,172, height 67
"Test Point" [mm]
  rect 1x1 smd: TP(0,0)
"Thru Test Point" [mil]
  round 60 hole 30: TH_TP(0,0)
TSSOP50P490X110-10N [mm] "TSSOP, 10-Leads, Body 3.00x3.00mm, Pitch 0.50mm, IPC Medium Density"
  rect 1.4x0.28 smd: 1(-2.14,1) 2(-2.14,0.5) 3(-2.14,0) 4(-2.14,-0.5) 5(-2.14,-1) 6(2.14,-1) 7(2.14,-0.5) 8(2.14,0) 9(2.14,0.5) 10(2.14,1)
  silkscreen extent -2.26,-1.52 1.15,1.81, body extent -2.45,-1.55 2.45,1.55, height 1.1

## Part data
+5V +6V +VTOP GND: library part "Thru Test Point"
C1: "2.2µF ±20% 100V Ceramic Capacitor X7R 1206 (3216 Metric)", Capacitance=2.2µF, Manufacturer 1="Murata Electronics North America", Manufacturer Part Number 1=GRM31CR72A225MA73L, Operating Temperature="-55°C ~ 125°C", Package / Case="1206 (3216 Metric)", Ratings=-, Supplier Part Number 1=490-12773-1-ND, Temperature Coefficient=X7R, Tolerance=±20%, Voltage=100V, ComponentLink1Description=http://www.murata.com/~/media/webrenewal/support/library/catalog/products/capacitor/mlcc/c02e.ashx, ComponentLink1URL=http://www.murata.com/~/media/webrenewal/support/library/catalog/products/capacitor/mlcc/c02e.ashx, Height - Seated (Max)=-, Lead Spacing=-, Lead Style=-, Mounting Type="Surface Mount, MLCC", Packaging="Cut Tape (CT)", Part Status=Active, Size / Dimension="0.126\" L x 0.063\" W (3.20mm x 1.60mm)", Supplier 1=Digi-Key, Thickness (Max)="0.071\" (1.80mm)"
C2: "10µF ±20% 25V Ceramic Capacitor X5R 0603 (1608 Metric)", Capacitance=10µF, Manufacturer 1="Murata Electronics North America", Manufacturer Part Number 1=GRM188R61E106MA73D, Operating Temperature="-55°C ~ 85°C", Package / Case="0603 (1608 Metric)", Ratings=-, Supplier Part Number 1=490-7202-1-ND, Temperature Coefficient=X5R, Tolerance=±20%, Voltage=25V, ComponentLink1Description=http://www.murata.com/~/media/webrenewal/support/library/catalog/products/capacitor/mlcc/c02e.ashx, ComponentLink1URL=http://www.murata.com/~/media/webrenewal/support/library/catalog/products/capacitor/mlcc/c02e.ashx, Height - Seated (Max)=-, Lead Spacing=-, Lead Style=-, Mounting Type="Surface Mount, MLCC", Packaging="Cut Tape (CT)", Part Status=Active, Size / Dimension="0.063\" L x 0.031\" W (1.60mm x 0.80mm)", Supplier 1=Digi-Key, Thickness (Max)="0.031\" (0.80mm)"
C3 C18 C19 C22: "1µF ±10% 50V Ceramic Capacitor X7R 0603 (1608 Metric)", Capacitance=1µF, Manufacturer 1="Taiyo Yuden", Manufacturer Part Number 1=UMK107AB7105KA-T, Operating Temperature="-55°C ~ 125°C", Package / Case="0603 (1608 Metric)", Ratings=-, Supplier Part Number 1=587-3247-1-ND, Temperature Coefficient=X7R, Tolerance=±10%, Voltage=50V, ComponentLink1Description=http://www.yuden.co.jp/productdata/catalog/en/mlcc_all_e.pdf, ComponentLink1URL=http://www.yuden.co.jp/productdata/catalog/en/mlcc_all_e.pdf, Height - Seated (Max)=-, Lead Spacing=-, Lead Style=-, Mounting Type="Surface Mount, MLCC", Packaging="Cut Tape (CT)", Part Status=Active, Size / Dimension="0.063\" L x 0.031\" W (1.60mm x 0.80mm)", Supplier 1=Digi-Key, Thickness (Max)="0.037\" (0.95mm)"
C4: "2.2µF ±10% 25V Ceramic Capacitor X5R 0603 (1608 Metric)", Capacitance=2.2µF, Manufacturer 1="Murata Electronics North America", Manufacturer Part Number 1=GRM188R61E225KA12D, Operating Temperature="-55°C ~ 85°C", Package / Case="0603 (1608 Metric)", Ratings=-, Supplier Part Number 1=490-10731-1-ND, Temperature Coefficient=X5R, Tolerance=±10%, Voltage=25V, ComponentLink1Description=http://www.murata.com/~/media/webrenewal/support/library/catalog/products/capacitor/mlcc/c02e.ashx, ComponentLink1URL=http://www.murata.com/~/media/webrenewal/support/library/catalog/products/capacitor/mlcc/c02e.ashx, Height - Seated (Max)=-, Lead Spacing=-, Lead Style=-, Mounting Type="Surface Mount, MLCC", Packaging="Cut Tape (CT)", Part Status=Active, Size / Dimension="0.063\" L x 0.031\" W (1.60mm x 0.80mm)", Supplier 1=Digi-Key, Thickness (Max)="0.035\" (0.90mm)"
C5 C6 C7 C8 C9 C10 C11 C12 C13 C14 C15 C16 C17 C24: "10000pF ±5% 50V Ceramic Capacitor U2J 0603 (1608 Metric)", Capacitance=10000pF, Manufacturer 1=KEMET, Manufacturer Part Number 1=C0603C103J5JAC7867, Operating Temperature="-55°C ~ 125°C", Package / Case="0603 (1608 Metric)", Ratings=-, Supplier Part Number 1=399-13384-1-ND, Temperature Coefficient=U2J, Tolerance=±5%, Voltage=50V, ComponentLink1Description=http://www.kemet.com/docfinder?Partnumber=C0603C103J5JAC7867, ComponentLink1URL=http://www.kemet.com/docfinder?Partnumber=C0603C103J5JAC7867, Failure Rate=-, Height - Seated (Max)=-, Lead Spacing=-, Lead Style=-, Mounting Type="Surface Mount, MLCC", Packaging="Cut Tape (CT)", Part Status=Active, Size / Dimension="0.063\" L x 0.032\" W (1.60mm x 0.80mm)", Supplier 1=Digi-Key, Thickness (Max)="0.034\" (0.87mm)"
C20 C21: "0.1µF ±10% 100V Ceramic Capacitor X7R 0805 (2012 Metric)", Capacitance=0.1µF, Manufacturer 1="Murata Electronics North America", Manufacturer Part Number 1=GCM21BR72A104KA37L, Operating Temperature="-55°C ~ 125°C", Package / Case="0805 (2012 Metric)", Ratings=AEC-Q200, Supplier Part Number 1=490-4789-1-ND, Temperature Coefficient=X7R, Tolerance=±10%, Voltage=100V, ComponentLink1Description=http://www.murata.com/~/media/webrenewal/support/library/catalog/products/capacitor/mlcc/c03e.ashx, ComponentLink1URL=http://www.murata.com/~/media/webrenewal/support/library/catalog/products/capacitor/mlcc/c03e.ashx, Height - Seated (Max)=-, Lead Spacing=-, Lead Style=-, Mounting Type="Surface Mount, MLCC", Packaging="Cut Tape (CT)", Part Status=Active, Size / Dimension="0.079\" L x 0.049\" W (2.00mm x 1.25mm)", Supplier 1=Digi-Key, Thickness (Max)="0.055\" (1.40mm)"
C23: "0.10µF ±10% 50V Ceramic Capacitor X7R 0603 (1608 Metric)", Capacitance=0.1µF, Manufacturer 1="AVX Corporation", Manufacturer Part Number 1=06035C104KAT2A, Operating Temperature="-55°C ~ 125°C", Package / Case="0603 (1608 Metric)", Ratings=-, Supplier Part Number 1=478-5052-1-ND, Temperature Coefficient=X7R, Tolerance=±10%, Voltage=50V, ComponentLink1Description=http://datasheets.avx.com/X7RDielectric.pdf, ComponentLink1URL=http://datasheets.avx.com/X7RDielectric.pdf, Height - Seated (Max)=-, Lead Spacing=-, Lead Style=-, Mounting Type="Surface Mount, MLCC", Packaging="Cut Tape (CT)", Part Status=Active, Size / Dimension="0.063\" L x 0.032\" W (1.60mm x 0.81mm)", Supplier 1=Digi-Key, Thickness (Max)="0.035\" (0.90mm)"
C25 C26: "20pF ±5% 50V Ceramic Capacitor C0G, NP0 0603 (1608 Metric)", Capacitance=20pF, Manufacturer 1="Murata Electronics North America", Manufacturer Part Number 1=GRM1885C1H200JA01D, Operating Temperature="-55°C ~ 125°C", Package / Case="0603 (1608 Metric)", Ratings=-, Supplier Part Number 1=490-1410-1-ND, Temperature Coefficient="C0G, NP0", Tolerance=±5%, Voltage=50V, ComponentLink1Description=http://www.murata.com/~/media/webrenewal/support/library/catalog/products/capacitor/mlcc/c02e.ashx, ComponentLink1URL=http://www.murata.com/~/media/webrenewal/support/library/catalog/products/capacitor/mlcc/c02e.ashx, Height - Seated (Max)=-, Lead Spacing=-, Lead Style=-, Mounting Type="Surface Mount, MLCC", Packaging="Cut Tape (CT)", Part Status=Active, Size / Dimension="0.063\" L x 0.031\" W (1.60mm x 0.80mm)", Supplier 1=Digi-Key, Thickness (Max)="0.035\" (0.90mm)"
D1 D2 D3 D4 D5 D6 D7 D8 D9 D10 D11 D12: "Zener Diode 6.2V 5W ±5% Surface Mount DO-214AA (SMB)", Current - Reverse Leakage @ Vr="1µA @ 3V", Manufacturer 1="Micro Commercial Co", Manufacturer Part Number 1=SMBJ5341B-TP, Operating Temperature="-55°C ~ 150°C", Package / Case="DO-214AA, SMB", Supplier Device Package="DO-214AA (SMB)", Supplier Part Number 1=SMBJ5341B-TPMSCT-ND, Tolerance=±5%, Voltage - Forward (Vf) (Max) @ If="1.2V @ 1A", Voltage - Zener (Nom)=6.2V, ComponentLink1Description=http://www.mccsemi.com/up_pdf/SMBJ5338B-SMBJ5388B(SMB).pdf, ComponentLink1URL=http://www.mccsemi.com/up_pdf/SMBJ5338B-SMBJ5388B(SMB).pdf, Mounting Type="Surface Mount", Packaging="Cut Tape (CT)", Part Status=Active, Supplier 1=Digi-Key
F1 F2 F3 F4 F5 F6 F7 F8 F9 F10 F11 F12 F13: "Board Mount Fuse 750MA 32VAC 63VDC", Breaking Capacity @ Rated Voltage="35A AC, 50A DC", Color=-, Current Rating=750mA, Manufacturer 1="Bel Fuse Inc.", Manufacturer Part Number 1="C2Q 750", Operating Temperature="-55°C ~ 125°C", Package / Case="0603 (1608 Metric)", Supplier Part Number 1=507-1090-1-ND, Approvals="CE, cULus", ComponentLink1Description=https://belfuse.com/resources/StewartConnector/C2Q.pdf, ComponentLink1URL=https://belfuse.com/resources/StewartConnector/C2Q.pdf, Fuse Type="Board Mount (Cartridge Style Excluded)", Mounting Type="Surface Mount", Packaging="Cut Tape (CT)", Part Status=Active, Response Time=Fast, Size / Dimension="0.063\" L x 0.032\" W x 0.019\" H (1.60mm x 0.82mm x 0.48mm)", Supplier 1=Digi-Key
F14 F15: Case/Package=0603, Case Code (Metric)=1608, Current Rating=250mA, DC Cold Resistance=650mR, Manufacturer="Kyocera AVX", Manufacturer Part Number=F0603E0R25FSTR, Max Operating Temperature=125°C, Max Voltage Rating (DC)=32V, Min Operating Temperature=-55°C, Package Quantity=1, Supplier Part Number 1=478-2858-1-ND, Approvals=UL, Case Code (Imperial)=0603, ComponentLink1Description=https://datasheet.ciiva.com/301/accug2-301328.pdf, ComponentLink1URL=https://datasheet.ciiva.com/301/accug2-301328.pdf, ComponentLink2Description=https://datasheet.ciiva.com/301/accug2-301329.pdf, ComponentLink2URL=https://datasheet.ciiva.com/301/accug2-301329.pdf, ComponentLink3Description=https://datasheet.ciiva.com/7650/accugrd-7650774.pdf, ComponentLink3URL=https://datasheet.ciiva.com/7650/accugrd-7650774.pdf, ComponentLink4Description=https://datasheet.ciiva.com/28473/1819437-28473548.pdf, ComponentLink4URL=https://datasheet.ciiva.com/28473/1819437-28473548.pdf, ComponentLink5Description=https://datasheet.ciiva.com/301/accug2-301327.pdf, ComponentLink5URL=https://datasheet.ciiva.com/301/accug2-301327.pdf, Composition="Thin Film", Contact Plating=Tin,Matte, Depth=0.81mm, Fuse Current=250mA, Fuse Type="Board Mount (Cartridge Style Excluded)", Height=0.63mm, Lead Free="Lead Free", Length=1.6mm, Mount="Surface Mount", Number of Pins=2, Packaging="Tape and Reel", Pricing 1="1=0.41, 5=0.394, 10=0.381, 50=0.3206, 100=0.2662, 250=0.242, 500=0.2057, 1000=0.1815 (USD)", Radiation Hardening=No, REACH SVHC="No SVHC", Resistance=650mR, Stock 1=48569, Supplier 1=Digi-Key, Terminal Material=Nickel, Voltage Rating=32V, Voltage Rating (AC)=32V, Voltage Rating (DC)=32V, Width=0.81mm
L1: "220µH Shielded Inductor 590mA 834 mOhm Nonstandard", Current - Saturation=700mA, Current Rating=590mA, DC Resistance (DCR)="834 mOhm", Frequency - Self Resonant=3.5MHz, Inductance=220µH, Manufacturer 1="Laird-Signal Integrity Products", Manufacturer Part Number 1=TYS6045221M-10, Operating Temperature="-40°C ~ 125°C", Package / Case=Nonstandard, Q @ Freq=-, Ratings=AEC-Q200, Supplier Part Number 1=240-2742-1-ND, Tolerance=±20%, ComponentLink1Description=http://assets.lairdtech.com/home/brandworld/files/TYS6045221M-10.pdf, ComponentLink1URL=http://assets.lairdtech.com/home/brandworld/files/TYS6045221M-10.pdf, Height - Seated (Max)="0.185\" (4.70mm)", Material - Core=-, Mounting Type="Surface Mount", Packaging="Cut Tape (CT)", Part Status=Active, Shielding=Shielded, Size / Dimension="0.236\" L x 0.236\" W (6.00mm x 6.00mm)", Supplier 1=Digi-Key, Supplier Device Package=-, Type=-
LED1: "Red 631nm LED Indication - Discrete 2V 0603 (1608 Metric)", Color=Red, Current - Test=20mA, Lens Color=Colorless, Manufacturer="Wurth Electronics Inc.", Manufacturer Part Number=150060RS75000, Millicandela Rating=250mcd, Package / Case="0603 (1608 Metric)", Supplier Device Package=0603, Supplier Part Number 1=732-4978-1-ND, Voltage - Forward (Vf) (Typ)=2V, Category=Optoelectronics, ComponentLink1Description=http://katalog.we-online.de/led/datasheet/150060RS75000.pdf, ComponentLink1URL=http://katalog.we-online.de/led/datasheet/150060RS75000.pdf, Features=-, Height (Max)=0.80mm, Lens Style/Size="Rectangle with Flat Top, 1.10mm x 0.70mm", Lens Transparency=Clear, Mounting Type="Surface Mount", Packaging="Cut Tape (CT)", Part Status=Active, Pricing 1="1=0.21, 100=0.1617, 500=0.13964 (CAD)", RoHS="RoHS Compliant", Size / Dimension="1.60mm L x 0.80mm W", Stock 1=35521, Supplier 1=Digi-Key, Viewing Angle=140°, Wavelength - Dominant=625nm, Wavelength - Peak=630nm
LED2: "Yellow 590nm LED Indication - Discrete 2V 0603 (1608 Metric)", Color=Yellow, Current - Test=20mA, Lens Color=Colorless, Manufacturer="Wurth Electronics Inc.", Manufacturer Part Number=150060YS75000, Millicandela Rating=120mcd, Package / Case="0603 (1608 Metric)", Supplier Device Package=0603, Supplier Part Number 1=732-4981-1-ND, Voltage - Forward (Vf) (Typ)=2V, Category=Optoelectronics, ComponentLink1Description=http://katalog.we-online.de/led/datasheet/150060YS75000.pdf, ComponentLink1URL=http://katalog.we-online.de/led/datasheet/150060YS75000.pdf, Features=-, Height (Max)=0.80mm, Lens Style/Size="Rectangle with Flat Top, 1.10mm x 0.70mm", Lens Transparency=Clear, Mounting Type="Surface Mount", Packaging="Cut Tape (CT)", Part Status=Active, Pricing 1="1=0.21, 100=0.1617, 500=0.13964 (CAD)", RoHS="RoHS Compliant", Size / Dimension="1.60mm L x 0.80mm W", Stock 1=10523, Supplier 1=Digi-Key, Viewing Angle=140°, Wavelength - Dominant=590nm, Wavelength - Peak=595nm
LED3: "Green 572nm LED Indication - Discrete 2V 0603 (1608 Metric)", Color=Green, Current - Test=20mA, Lens Color=Colorless, Manufacturer="Wurth Electronics Inc.", Manufacturer Part Number=150060VS75000, Millicandela Rating=40mcd, Package / Case="0603 (1608 Metric)", Supplier Device Package=0603, Supplier Part Number 1=732-4980-1-ND, Voltage - Forward (Vf) (Typ)=2V, Category=Optoelectronics, ComponentLink1Description=http://katalog.we-online.de/led/datasheet/150060VS75000.pdf, ComponentLink1URL=http://katalog.we-online.de/led/datasheet/150060VS75000.pdf, Features=-, Height (Max)=0.80mm, Lens Style/Size="Rectangle with Flat Top, 1.10mm x 0.70mm", Lens Transparency=Clear, Mounting Type="Surface Mount", Packaging="Cut Tape (CT)", Part Status=Active, Pricing 1="1=0.21, 100=0.1617, 500=0.13964 (CAD)", RoHS="RoHS Compliant", Size / Dimension="1.60mm L x 0.80mm W", Stock 1=9408, Supplier 1=Digi-Key, Viewing Angle=140°, Wavelength - Dominant=570nm, Wavelength - Peak=572nm
P1: library part "CONN 6POS DURA-CLIK 0.079\"", "6 Positions Header, Shrouded Connector 0.079\" (2.00mm) Surface Mount, Vertical Tin", Current Rating=-, Insulation Color=Natural, Manufacturer=Molex, Manufacturer Part Number=5600200820, Supplier Part Number 1=WM10866CT-ND, Applications="Automotive, Industrial", Category="Connectors, Interconnects", ComponentLink1Description=http://www.molex.com/pdm_docs/sd/5600200220_sd.pdf, ComponentLink1URL=http://www.molex.com/pdm_docs/sd/5600200220_sd.pdf, Connector Type=Header, Contact Finish - Mating=Tin, Contact Finish - Post=Tin, Contact Finish Thickness - Mating=-, Contact Finish Thickness - Post=-, Contact Length - Mating=-, Contact Length - Post=-, Contact Material="Copper Alloy", Contact Shape=Square, Contact Type="Male Pin", Fastening Type="Latch Lock", Features="Solder Retention", Ingress Protection=-, Insulation Height="0.315\" (8.00mm)", Insulation Material="Polyamide (PA), Nylon", Mated Stacking Heights=9.3mm, Material Flammability Rating=-, Mounting Type="Surface Mount", Number of Positions=6, Number of Positions Loaded=All, Number of Rows=1, Operating Temperature=-, Overall Contact Length=-, Packaging="Cut Tape (CT)", Part Status=Active, Pitch - Mating="0.079\" (2.00mm)", Pricing 1="1=1.76, 10=1.542, 25=1.4512, 50=1.391, 100=1.3305, 250=1.20956 (CAD)", RoHS="RoHS Compliant", Row Spacing - Mating=-, Shrouding="Shrouded - 4 Wall", Stock 1=3826, Style="Board to Cable/Wire", Supplier 1=Digi-Key, Termination=Solder, Voltage Rating=-
P2 P3 P4: "8 Positions Header Connector 0.079\" (2.00mm) Surface Mount Tin", Current Rating=-, Insulation Color=Natural, Manufacturer 1="Molex, LLC", Manufacturer Part Number 1=5600200820, Supplier Part Number 1=WM10868CT-ND, ComponentLink1Description=http://www.molex.com/pdm_docs/sd/5600200820_sd.pdf, ComponentLink1URL=http://www.molex.com/pdm_docs/sd/5600200820_sd.pdf, Connector Type=Header, Contact Finish - Mating=Tin, Contact Finish - Post=Tin, Contact Finish Thickness - Mating=-, Contact Finish Thickness - Post=-, Contact Length - Mating=-, Contact Length - Post=-, Contact Material="Copper Alloy", Contact Shape=Square, Contact Type="Male Pin", Fastening Type="Latch Lock", Ingress Protection=-, Insulation Height="0.315\" (8.00mm)", Insulation Material="Polyamide (PA), Nylon", Mated Stacking Heights=9.3mm, Material Flammability Rating=-, Mounting Type="Surface Mount", Number of Positions=8, Number of Positions Loaded=All, Number of Rows=1, Operating Temperature=-, Overall Contact Length=-, Packaging="Cut Tape (CT)", Part Status=Active, Pitch - Mating="0.079\" (2.00mm)", Row Spacing - Mating=-, Series=DuraClik, Shrouding="Shrouded - 4 Wall", Style="Board to Cable/Wire", Supplier 1=Digi-Key, Termination=Solder, Voltage=-
P5: "4 Positions Header Connector 0.100\" (2.54mm) Through Hole Gold", Current Rating=3A, Insulation Color=Black, Manufacturer 1="Wurth Electronics Inc.", Manufacturer Part Number 1=61300411121, Material Flammability Rating="UL94 V-0", Operating Temperature="-40°C ~ 125°C", Supplier Part Number 1=732-5317-ND, Voltage=250V, ComponentLink1Description=http://katalog.we-online.de/em/datasheet/6130xx11121.pdf, ComponentLink1URL=http://katalog.we-online.de/em/datasheet/6130xx11121.pdf, Connector Type=Header, Contact Finish - Mating=Gold, Contact Finish - Post=-, Contact Finish Thickness - Mating=-, Contact Finish Thickness - Post=-, Contact Length - Mating="0.236\" (6.00mm)", Contact Length - Post="0.118\" (3.00mm)", Contact Material="Copper Alloy", Contact Shape=Square, Contact Type="Male Pin", Fastening Type=-, Ingress Protection=-, Insulation Height="0.100\" (2.54mm)", Insulation Material="Polybutylene Terephthalate (PBT)", Mated Stacking Heights=-, Mounting Type="Through Hole", Number of Positions=4, Number of Positions Loaded=All, Number of Rows=1, Overall Contact Length="0.454\" (11.54mm)", Packaging=Bulk, Part Status=Active, Pitch - Mating="0.100\" (2.54mm)", Row Spacing - Mating=-, Shrouding=Unshrouded, Style="Board to Board or Cable", Supplier 1=Digi-Key, Termination=Solder
P6 P7: library part "CONN 2POS DURA-CLIK 0.079\" VERT", "2 Positions Header, Shrouded Connector 0.079\" (2.00mm) Surface Mount, Vertical Tin", Current Rating=-, Insulation Color=Natural, Manufacturer="Molex, LLC", Manufacturer Part Number=5600200220, Supplier Part Number 1=WM10862CT-ND, Applications="Automotive, Industrial", Category="Connectors, Interconnects", ComponentLink1Description=http://www.molex.com/pdm_docs/sd/5600200220_sd.pdf, ComponentLink1URL=http://www.molex.com/pdm_docs/sd/5600200220_sd.pdf, Connector Type=Header, Contact Finish - Mating=Tin, Contact Finish - Post=Tin, Contact Finish Thickness - Mating=-, Contact Finish Thickness - Post=-, Contact Length - Mating=-, Contact Length - Post=-, Contact Material="Copper Alloy", Contact Shape=Square, Contact Type="Male Pin", Fastening Type="Latch Lock", Features="Solder Retention", Ingress Protection=-, Insulation Height="0.315\" (8.00mm)", Insulation Material="Polyamide (PA), Nylon", Mated Stacking Heights=9.3mm, Material Flammability Rating=-, Mounting Type="Surface Mount", Number of Positions=2, Number of Positions Loaded=All, Number of Rows=1, Operating Temperature=-, Overall Contact Length=-, Packaging="Cut Tape (CT)", Part Status=Active, Pitch - Mating="0.079\" (2.00mm)", Pricing 1="1=1.16, 10=1.012, 25=0.952, 50=0.9122, 100=0.8727, 250=0.79336 (CAD)", RoHS="RoHS Compliant", Row Spacing - Mating=-, Shrouding="Shrouded - 4 Wall", Stock 1=11912, Style="Board to Cable/Wire", Supplier 1=Digi-Key, Termination=Solder, Voltage Rating=-
Q1 Q2 Q3 Q4 Q5 Q6 Q7 Q8 Q9 Q10 Q11 Q12: "P-Channel 16V 2.5A (Ta) 650mW (Ta) Surface Mount X2-DFN2015-3", Current - Continuous Drain (Id) @ 25°C="2.5A (Ta)", Drain to Source Voltage (Vdss)=16V, Drive Voltage (Max Rds On,  Min Rds On)="1.8V, 4.5V", Input Capacitance (Ciss) (Max) @ Vds="282pF @ 10V", Manufacturer 1="Diodes Incorporated", Manufacturer Part Number 1=DMG3415UFY4Q-7, Operating Temperature="-55°C ~ 150°C (TJ)", Package / Case=3-XFDFN, Power Dissipation (Max)="650mW (Ta)", Supplier Device Package=X2-DFN2015-3, Supplier Part Number 1=DMG3415UFY4Q-7DICT-ND, ComponentLink1Description=https://www.diodes.com/assets/Datasheets/DMG3415UFY4Q.pdf, ComponentLink1URL=https://www.diodes.com/assets/Datasheets/DMG3415UFY4Q.pdf, FET Feature=-, FET Type=P-Channel, Gate Charge (Qg) (Max) @ Vgs="10nC @ 4.5V", Mounting Type="Surface Mount", Packaging="Cut Tape (CT)", Part Status=Active, Rds On (Max) @ Id, Vgs="39 mOhm @ 4A, 4.5V", Supplier 1=Digi-Key, Technology="MOSFET (Metal Oxide)", Vgs (Max)=±8V, Vgs(th) (Max) @ Id="1V @ 250µA"
R1: "RES SMD 33K OHM 1% 1/4W 0603", Manufacturer 1="Panasonic Electronic Components", Manufacturer Part Number 1=ERJ-PA3F3302V, Operating Temperature="-55°C ~ 155°C", Package / Case="0603 (1608 Metric)", Power=1/4W, Resistance=33k, Supplier Device Package=0603, Supplier Part Number 1=P33KBYCT-ND, Temperature Coefficient=±100ppm/°C, Tolerance=±1%, ComponentLink1Description=https://industrial.panasonic.com/cdbs/www-data/pdf/RDO0000/AOA0000C291.pdf, ComponentLink1URL=https://industrial.panasonic.com/cdbs/www-data/pdf/RDO0000/AOA0000C291.pdf, Composition="Thick Film", Failure Rate=-, Height - Seated (Max)="0.022\" (0.55mm)", Packaging="Cut Tape (CT)", Part Status=Active, Size / Dimension="0.063\" L x 0.031\" W (1.60mm x 0.80mm)", Supplier 1=Digi-Key
R2 R4 R42 R43 R44 R45 R46 R47 R54 R55 R56 R57 R58 R59: "3.3k Ohm ±1% 0.25W, 1/4W Chip Resistor 0603 (1608 Metric) Automotive AEC-Q200, Pulse Withstanding Thick Film", Manufacturer 1="Panasonic Electronic Components", Manufacturer Part Number 1=ERJ-PA3F3301V, Operating Temperature="-55°C ~ 155°C", Package / Case="0603 (1608 Metric)", Power=1/4W, Resistance=3.3k, Supplier Device Package=0603, Supplier Part Number 1=P3.3KBYCT-ND, Temperature Coefficient=±100ppm/°C, Tolerance=±1%, ComponentLink1Description=https://industrial.panasonic.com/cdbs/www-data/pdf/RDO0000/AOA0000C291.pdf, ComponentLink1URL=https://industrial.panasonic.com/cdbs/www-data/pdf/RDO0000/AOA0000C291.pdf, Composition="Thick Film", Failure Rate=-, Height - Seated (Max)="0.022\" (0.55mm)", Packaging="Cut Tape (CT)", Part Status=Active, Size / Dimension="0.063\" L x 0.031\" W (1.60mm x 0.80mm)", Supplier 1=Digi-Key
R3: "RES SMD 820 OHM 5% 1/4W 0603", Manufacturer 1="Rohm Semiconductor", Manufacturer Part Number 1=ESR03EZPJ821, Operating Temperature="-55°C ~ 155°C", Package / Case="0603 (1608 Metric)", Power=1/4W, Resistance=820, Supplier Device Package=0603, Supplier Part Number 1=RHM820DCT-ND, Temperature Coefficient=±200ppm/°C, Tolerance=±5%, ComponentLink1Description=http://www.rohm.com/web/global/datasheet/ESR01MZPF/esr-e, ComponentLink1URL=http://www.rohm.com/web/global/datasheet/ESR01MZPF/esr-e, Composition="Thick Film", Failure Rate=-, Height - Seated (Max)="0.022\" (0.55mm)", Packaging="Cut Tape (CT)", Part Status=Active, Size / Dimension="0.063\" L x 0.031\" W (1.60mm x 0.80mm)", Supplier 1=Digi-Key
R5 R60: "RES SMD 10K OHM 1% 1/10W 0603", Manufacturer 1=Yageo, Manufacturer Part Number 1=RC0603FR-0710KL, Operating Temperature="-55°C ~ 155°C", Package / Case="0603 (1608 Metric)", Power=1/10W, Resistance=10k, Supplier Device Package=0603, Supplier Part Number 1=311-10.0KHRCT-ND, Temperature Coefficient=±100ppm/°C, Tolerance=±1%, ComponentLink1Description=http://www.yageo.com/documents/recent/PYu-RC_Group_51_RoHS_L_7.pdf, ComponentLink1URL=http://www.yageo.com/documents/recent/PYu-RC_Group_51_RoHS_L_7.pdf, Composition="Thick Film", Failure Rate=-, Height - Seated (Max)="0.022\" (0.55mm)", Packaging="Cut Tape (CT)", Part Status=Active, Size / Dimension="0.063\" L x 0.031\" W (1.60mm x 0.80mm)", Supplier 1=Digi-Key
R6: "191k Ohm ±1% 0.1W, 1/10W Chip Resistor 0603 (1608 Metric) Moisture Resistant Thick Film", Manufacturer 1=Yageo, Manufacturer Part Number 1=RC0603FR-07191KL, Operating Temperature="-55°C ~ 155°C", Package / Case="0603 (1608 Metric)", Power=1/10W, Resistance=191k, Supplier Device Package=0603, Supplier Part Number 1=311-191KHRCT-ND, Temperature Coefficient=±100ppm/°C, Tolerance=±1%, ComponentLink1Description=http://www.yageo.com/documents/recent/PYu-RC_Group_51_RoHS_L_7.pdf, ComponentLink1URL=http://www.yageo.com/documents/recent/PYu-RC_Group_51_RoHS_L_7.pdf, Composition="Thick Film", Failure Rate=-, Height - Seated (Max)="0.022\" (0.55mm)", Packaging="Cut Tape (CT)", Part Status=Active, Size / Dimension="0.063\" L x 0.031\" W (1.60mm x 0.80mm)", Supplier 1=Digi-Key
R7: "39.2k Ohm ±1% 0.1W, 1/10W Chip Resistor 0603 (1608 Metric) Moisture Resistant Thick Film", Manufacturer 1=Yageo, Manufacturer Part Number 1=RC0603FR-0739K2L, Operating Temperature="-55°C ~ 155°C", Package / Case="0603 (1608 Metric)", Power=1/10W, Resistance=39.2k, Supplier Device Package=0603, Supplier Part Number 1=311-39.2KHRCT-ND, Temperature Coefficient=±100ppm/°C, Tolerance=±1%, ComponentLink1Description=http://www.yageo.com/documents/recent/PYu-RC_Group_51_RoHS_L_7.pdf, ComponentLink1URL=http://www.yageo.com/documents/recent/PYu-RC_Group_51_RoHS_L_7.pdf, Composition="Thick Film", Failure Rate=-, Height - Seated (Max)="0.022\" (0.55mm)", Packaging="Cut Tape (CT)", Part Status=Active, Size / Dimension="0.063\" L x 0.031\" W (1.60mm x 0.80mm)", Supplier 1=Digi-Key
R8: "255k Ohm ±1% 0.1W, 1/10W Chip Resistor 0603 (1608 Metric) Moisture Resistant Thick Film", Manufacturer 1=Yageo, Manufacturer Part Number 1=RC0603FR-07255KL, Operating Temperature="-55°C ~ 155°C", Package / Case="0603 (1608 Metric)", Power (Watts)=1/10W, Resistance (Ohms)=255k, Supplier Device Package=0603, Supplier Part Number 1=311-255KHRCT-ND, Temperature Coefficient=±100ppm/°C, Tolerance=±1%, Category=Resistors, ComponentLink1Description=http://www.yageo.com/documents/recent/PYu-RC_Group_51_RoHS_L_7.pdf, ComponentLink1URL=http://www.yageo.com/documents/recent/PYu-RC_Group_51_RoHS_L_7.pdf, Composition="Thick Film", Description 1="RES SMD 255K OHM 1% 1/10W 0603", Failure Rate=-, Features="Moisture Resistant", Height - Seated (Max)="0.022\" (0.55mm)", Packaging="Cut Tape (CT)", Part Status=Active, Pricing 1="1=0.16, 10=0.022, 100=0.0089, 1000=0.00402, 2500=0.00349 (CAD)", RoHS="RoHS Compliant", Size / Dimension="0.063\" L x 0.031\" W (1.60mm x 0.80mm)", Stock 1=106564, Supplier 1=Digi-Key
R9 R23 R26 R27 R28 R29 R63 R64: "RES SMD 0.0 OHM JUMPER 1/4W 0603", Manufacturer 1="Vishay Dale", Manufacturer Part Number 1=CRCW06030000Z0EAHP, Operating Temperature="-55°C ~ 155°C", Package / Case="0603 (1608 Metric)", Power (Watts)=1/4W, Resistance=0.0, Supplier Device Package=0603, Supplier Part Number 1=541-0.0SBCT-ND, ComponentLink1Description=http://www.vishay.com/docs/20043/crcwhpe3.pdf, ComponentLink1URL=http://www.vishay.com/docs/20043/crcwhpe3.pdf, Composition="Thick Film", Failure Rate=-, Height - Seated (Max)="0.022\" (0.55mm)", Packaging="Cut Tape (CT)", Part Status=Active, Size / Dimension="0.063\" L x 0.033\" W (1.60mm x 0.85mm)", Supplier 1=Digi-Key
  R27: DNS=DNS
R10 R11 R12 R13 R14 R15 R16 R17 R18 R19 R20 R21 R22 R30 R61: "100 Ohm ±1% 0.1W, 1/10W Chip Resistor 0603 (1608 Metric) Moisture Resistant Thick Film", Manufacturer 1=Yageo, Manufacturer Part Number 1=RC0603FR-07100RL, Operating Temperature="-55°C ~ 155°C", Package / Case="0603 (1608 Metric)", Power=1/10W, Resistance=100, Supplier Device Package=0603, Supplier Part Number 1=311-100HRCT-ND, Temperature Coefficient=±100ppm/°C, Tolerance=±1%, ComponentLink1Description=http://www.yageo.com/documents/recent/PYu-RC_Group_51_RoHS_L_7.pdf, ComponentLink1URL=http://www.yageo.com/documents/recent/PYu-RC_Group_51_RoHS_L_7.pdf, Composition="Thick Film", Failure Rate=-, Height - Seated (Max)="0.022\" (0.55mm)", Packaging="Cut Tape (CT)", Part Status=Active, Size / Dimension="0.063\" L x 0.031\" W (1.60mm x 0.80mm)", Supplier 1=Digi-Key
R24: "RES SMD 1.4K OHM 1% 1/10W 0603", Manufacturer 1=Yageo, Manufacturer Part Number 1=RC0603FR-071K4L, Operating Temperature="-55°C ~ 155°C", Package / Case="0603 (1608 Metric)", Power=1/10W, Resistance=1.4k, Supplier Device Package=0603, Supplier Part Number 1=311-1.40KHRCT-ND, Temperature Coefficient=±100ppm/°C, Tolerance=±1%, ComponentLink1Description=http://www.yageo.com/documents/recent/PYu-RC_Group_51_RoHS_L_7.pdf, ComponentLink1URL=http://www.yageo.com/documents/recent/PYu-RC_Group_51_RoHS_L_7.pdf, Composition="Thick Film", Failure Rate=-, Height - Seated (Max)="0.022\" (0.55mm)", Packaging="Cut Tape (CT)", Part Status=Active, Size / Dimension="0.063\" L x 0.031\" W (1.60mm x 0.80mm)", Supplier 1=Digi-Key
R25: "RES SMD 604 OHM 1% 1/10W 0603", Manufacturer 1=Yageo, Manufacturer Part Number 1=RC0603FR-07604RL, Operating Temperature="-55°C ~ 155°C", Package / Case="0603 (1608 Metric)", Power=1/10W, Resistance=604, Supplier Device Package=0603, Supplier Part Number 1=311-604HRCT-ND, Temperature Coefficient=±100ppm/°C, Tolerance=±1%, ComponentLink1Description=http://www.yageo.com/documents/recent/PYu-RC_Group_51_RoHS_L_7.pdf, ComponentLink1URL=http://www.yageo.com/documents/recent/PYu-RC_Group_51_RoHS_L_7.pdf, Composition="Thick Film", Failure Rate=-, Height - Seated (Max)="0.022\" (0.55mm)", Packaging="Cut Tape (CT)", Part Status=Active, Size / Dimension="0.063\" L x 0.031\" W (1.60mm x 0.80mm)", Supplier 1=Digi-Key